# Altium PCB PcbForControlBoard.PcbDoc (part 1 of 2)
Units mm, origin at the board's own origin, x right, y up, seen from the top; angles counter-clockwise.
Board outline 90 x 35 mm, 4 copper layers (Top Layer, MID1, MID2, Bottom Layer), stack 0.603 mm thick; 169 components, 143 nets, 686 pads, 29 vias.
Unrouted connection lines stored in the file: 418.
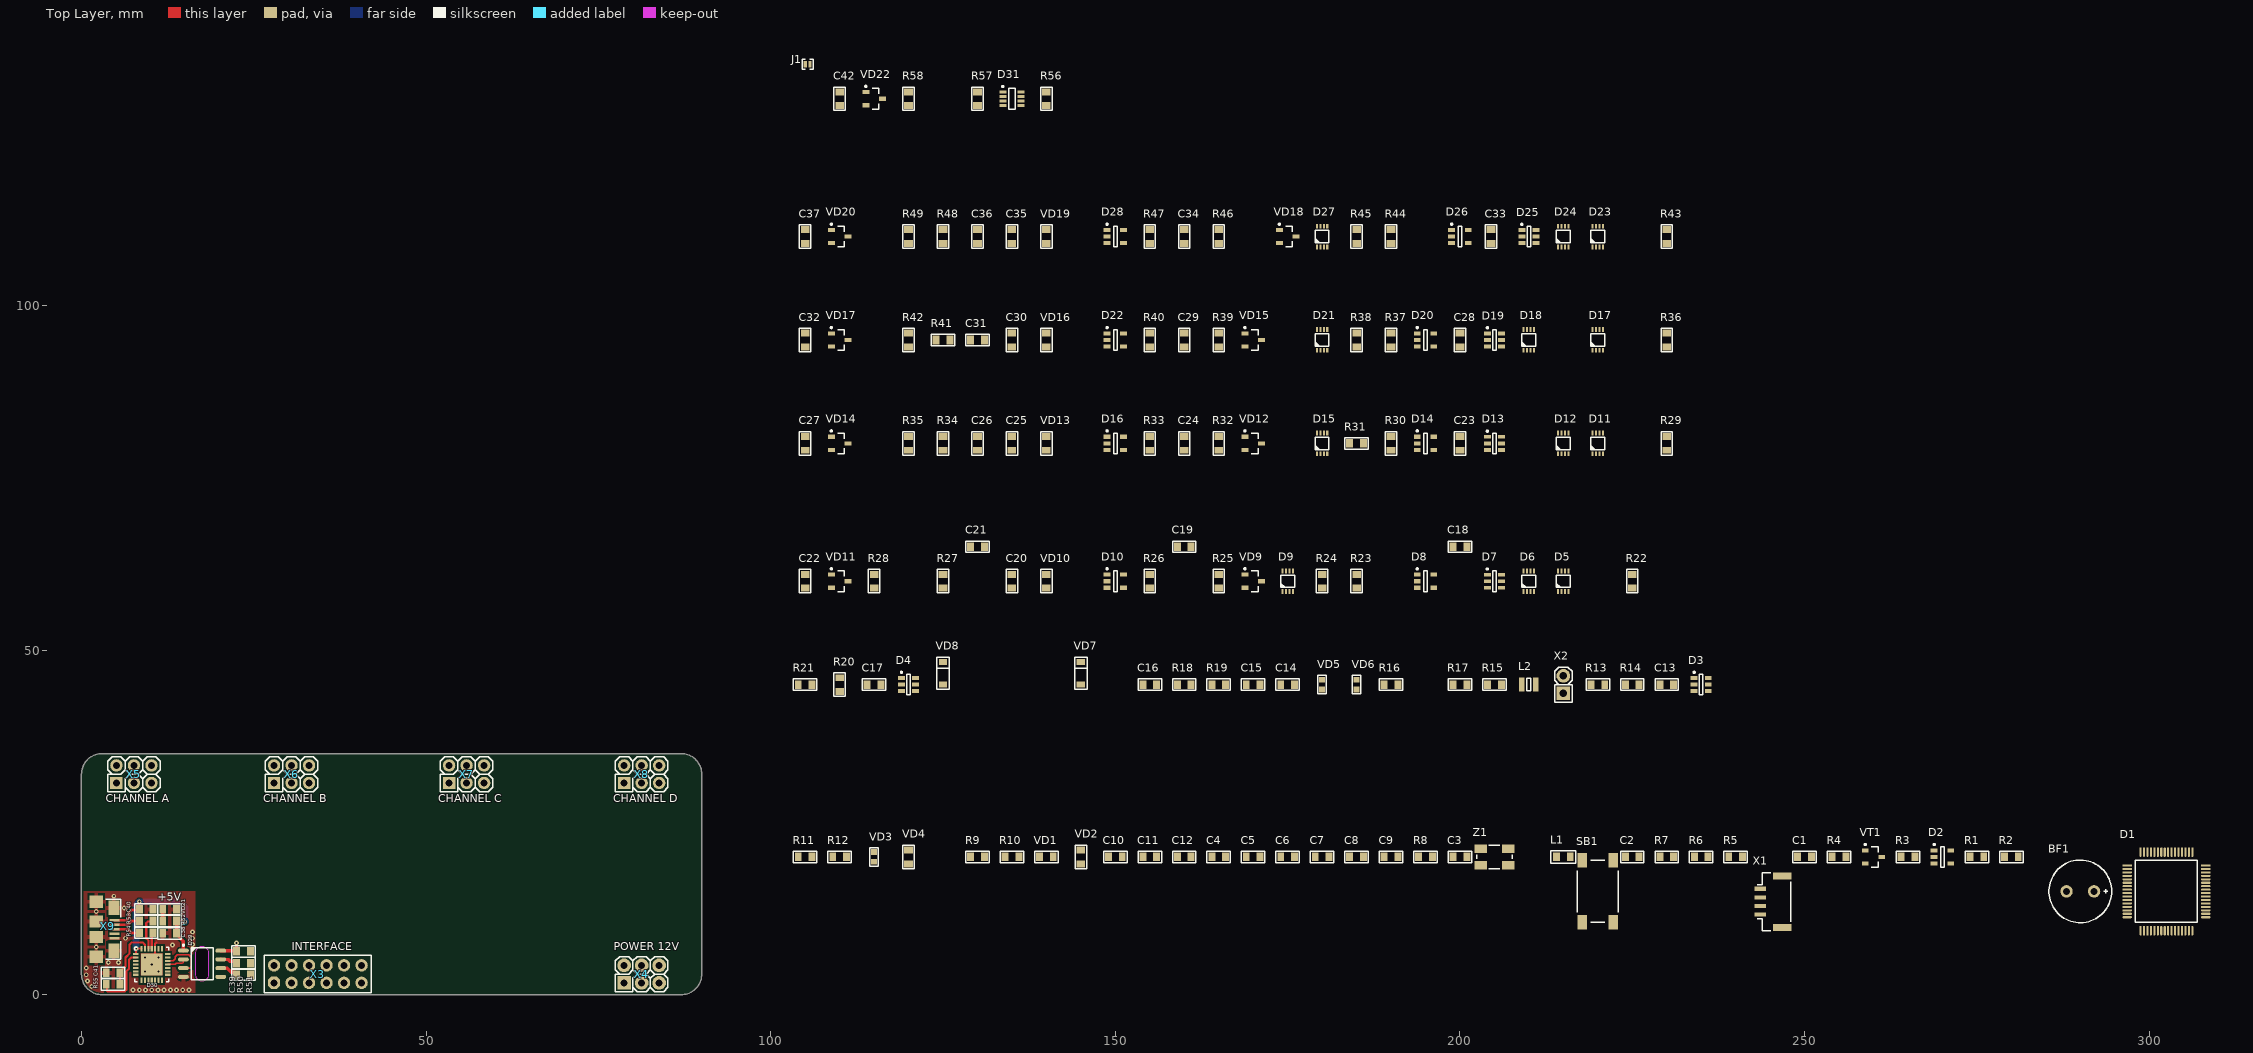
[diagram p0: Top Layer view]
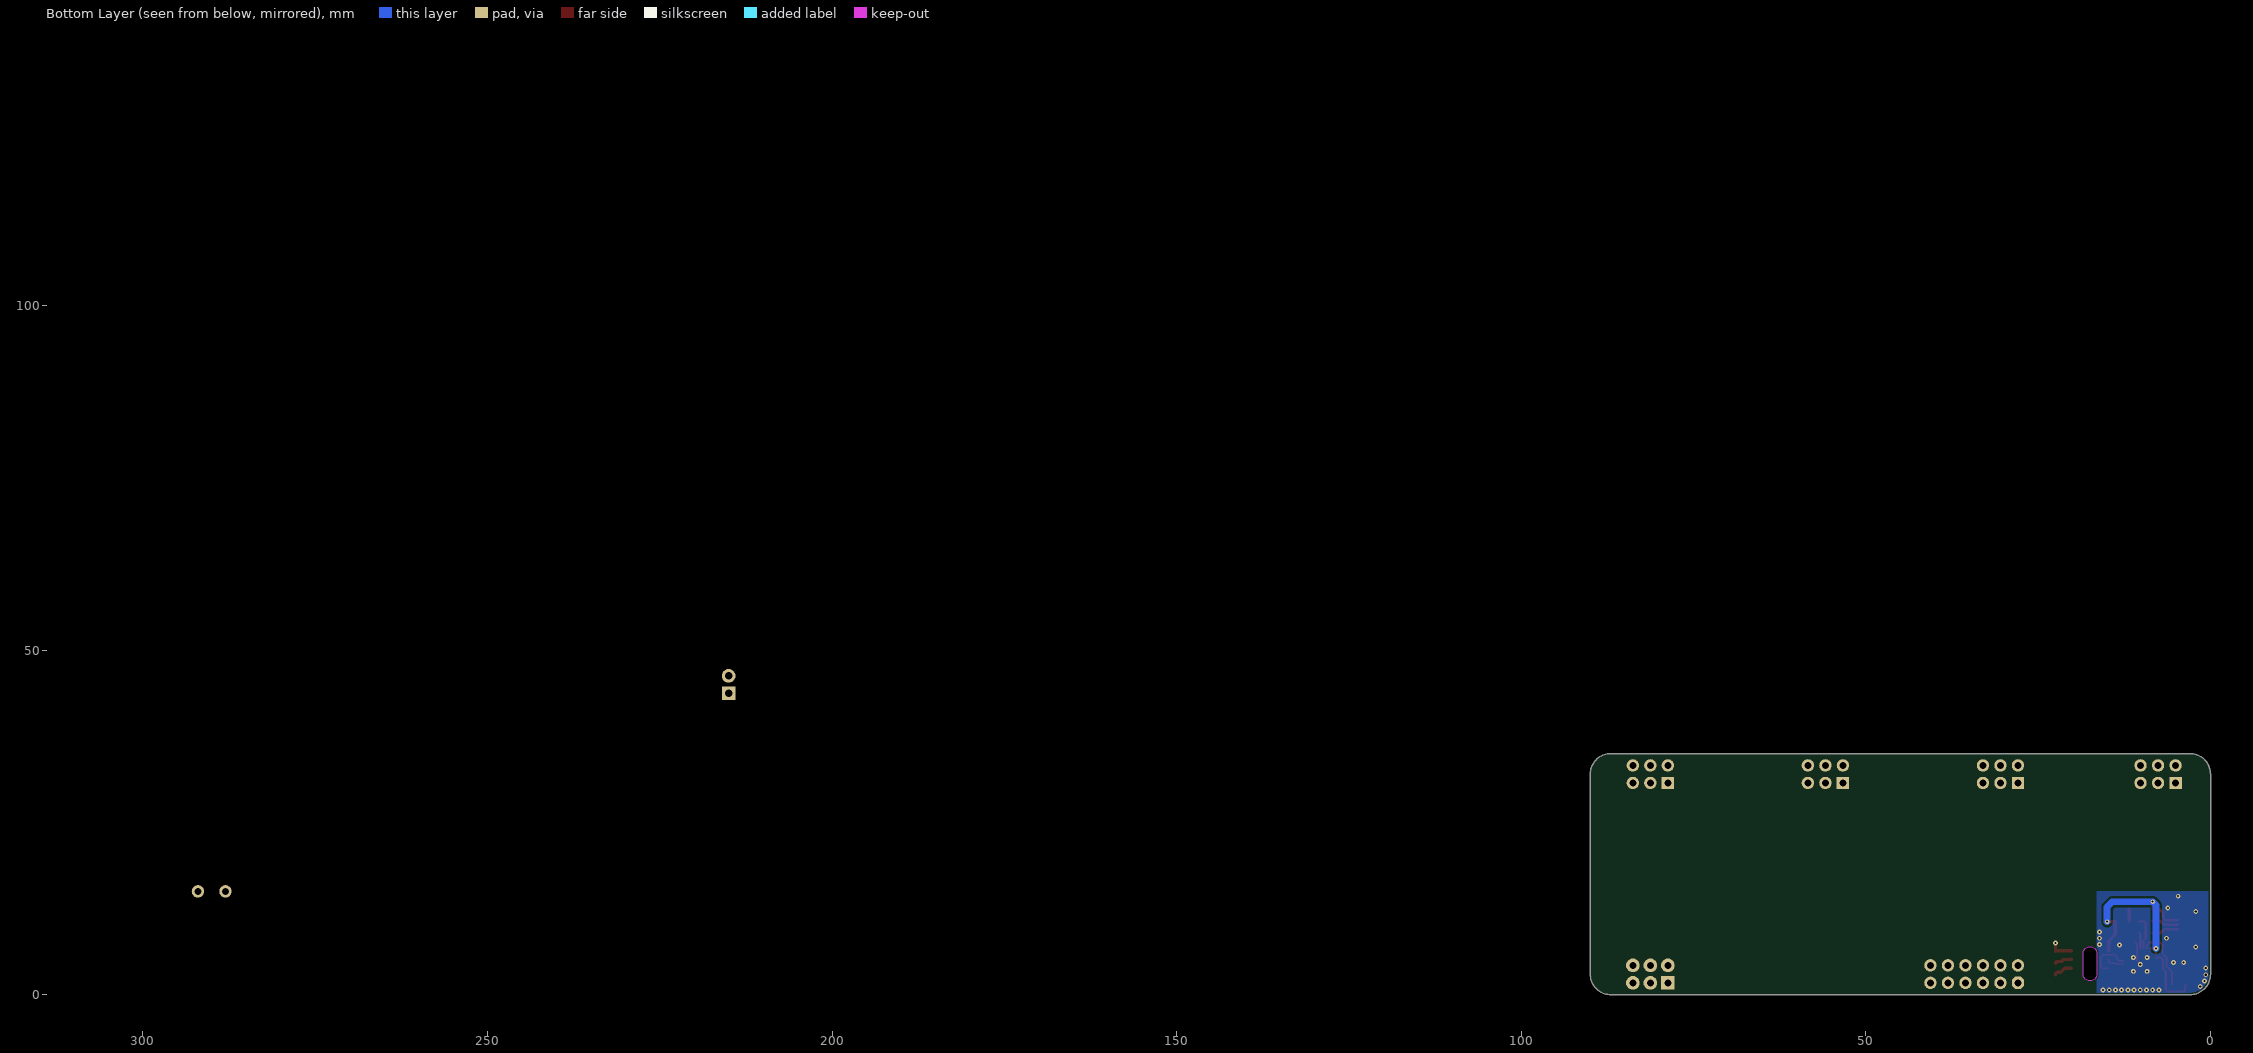
[diagram p1: Bottom Layer view, seen from below]
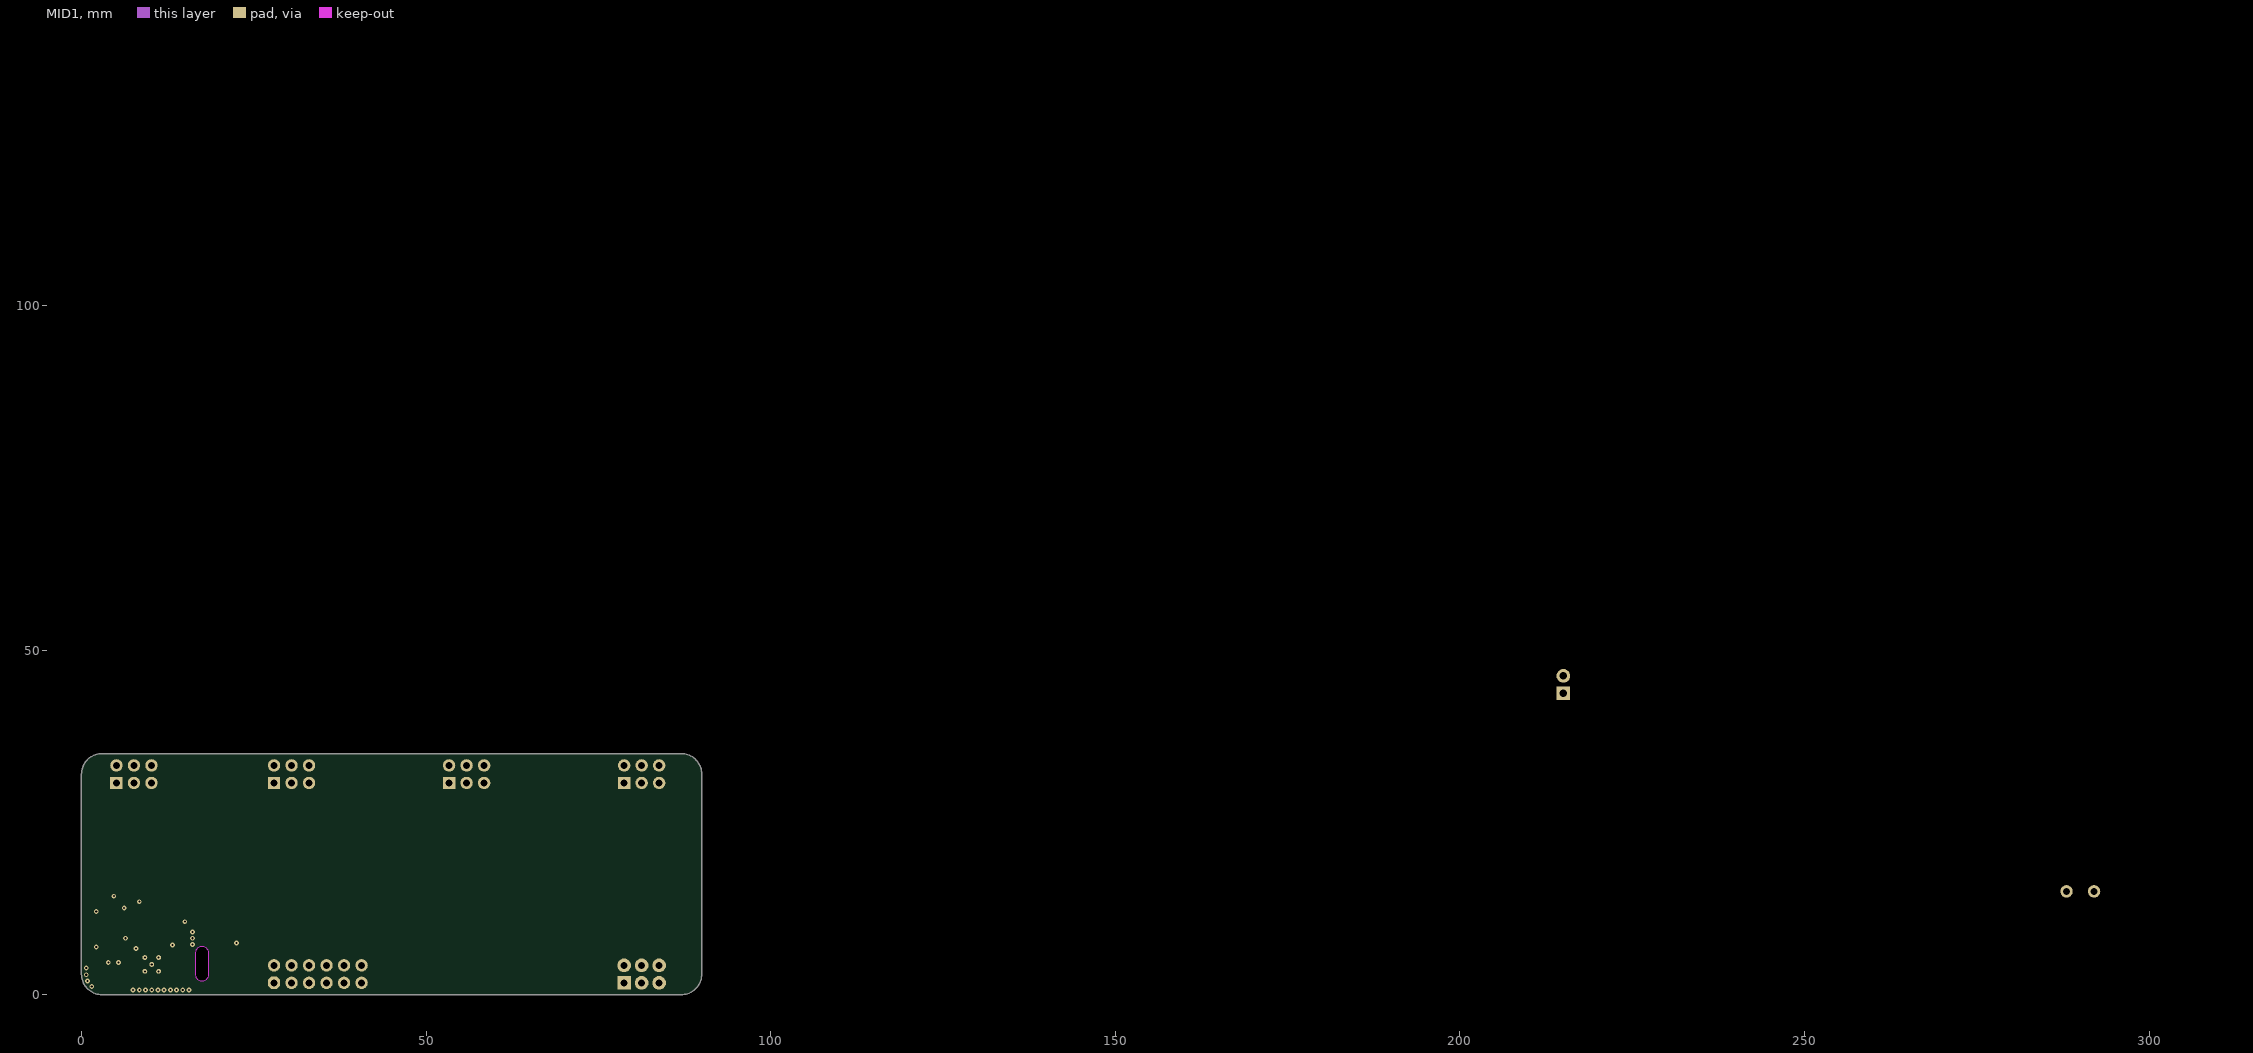
[diagram p2: MID1]
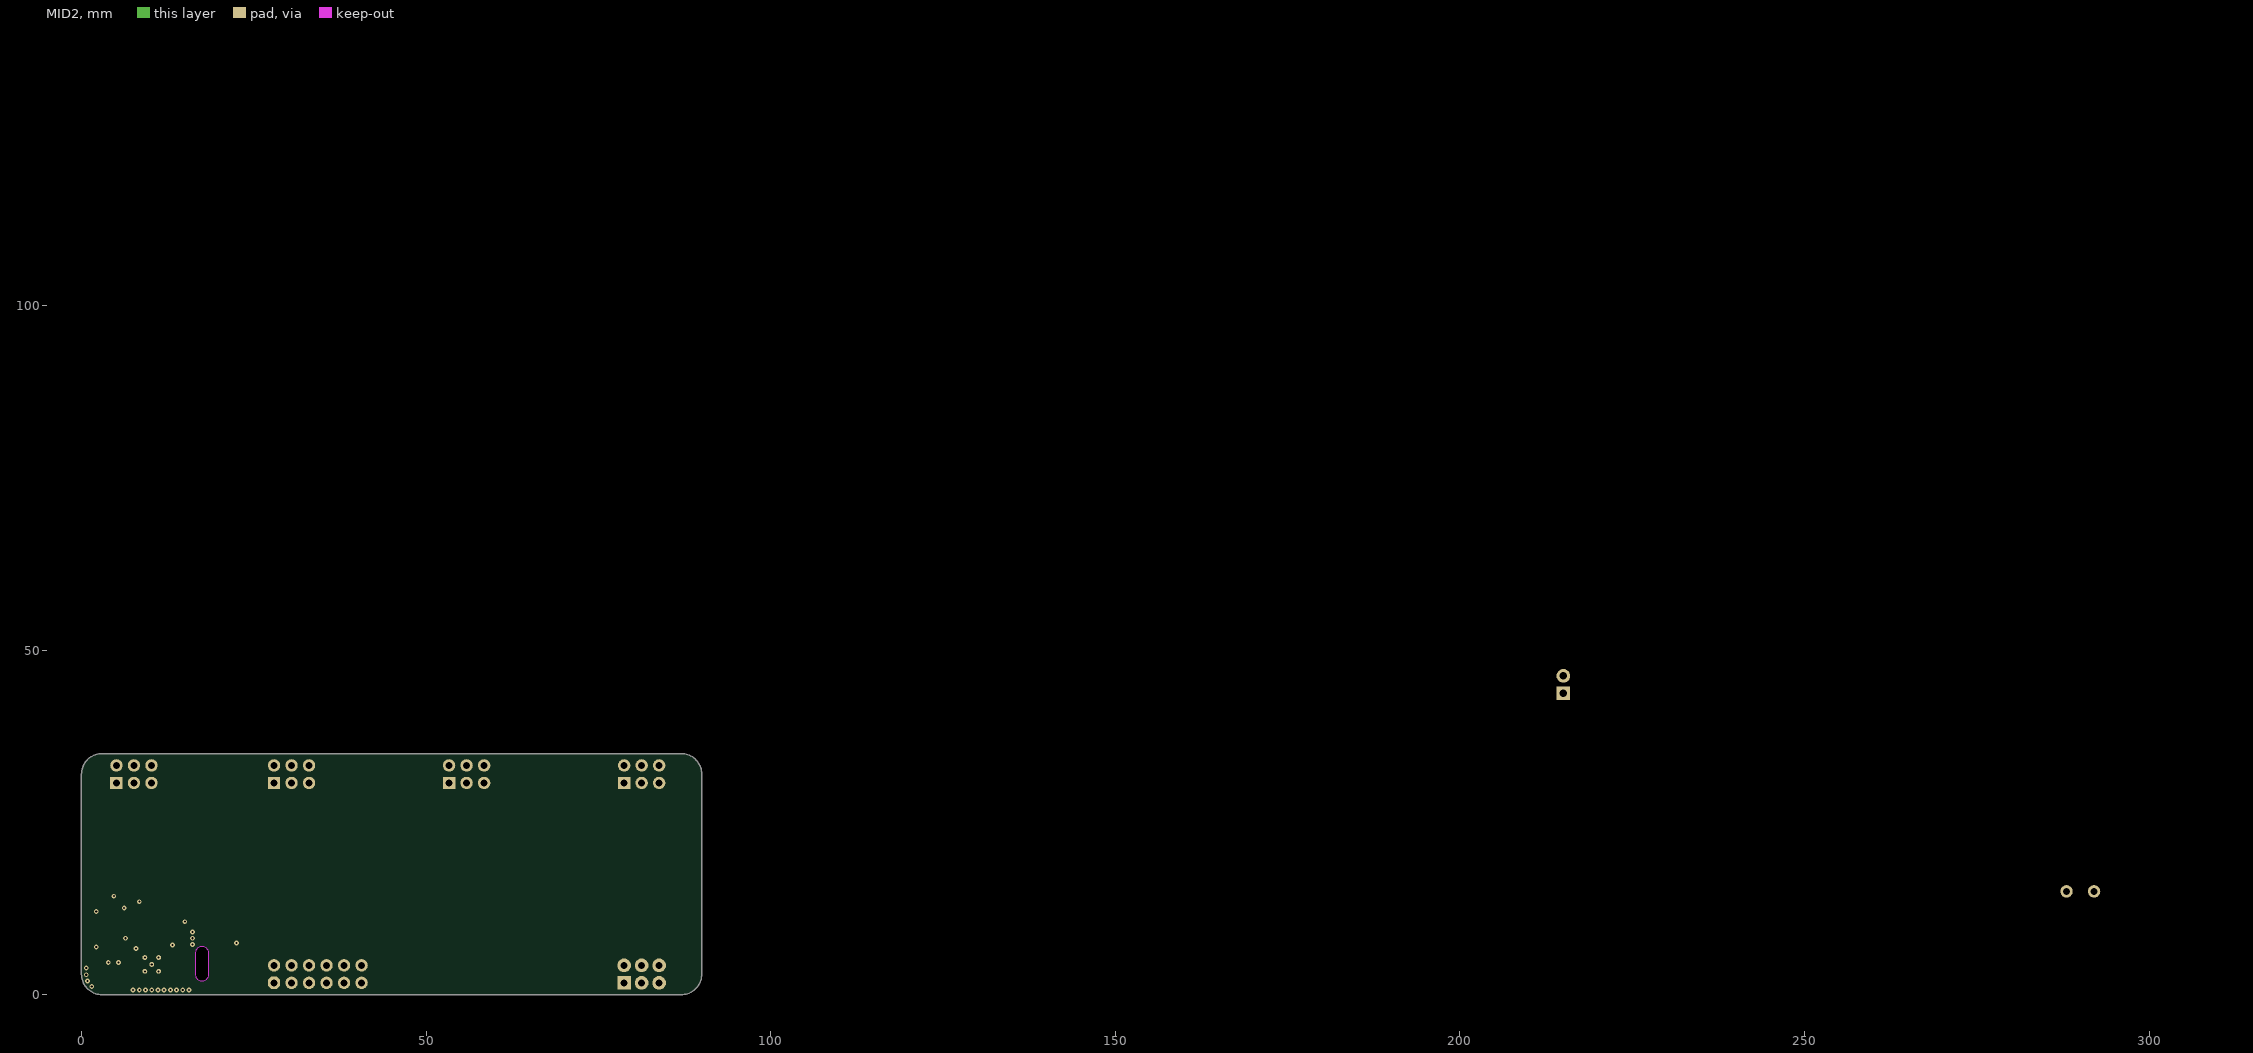
[diagram p3: MID2]

## Layer stack, top to bottom
Top Solder: solder mask 0.0102, Solder Resist, Dk 3.5
Top Layer: signal copper 0.0356
Dielectric 2: prepreg 0.0711, PP-006, Dk 4.1
MID1: signal copper 0.035
Dielectric 1: dielectric 0.32, FR-4, Dk 4.8
MID2: signal copper 0.035
Dielectric 3: prepreg 0.0711, PP-006, Dk 4.1
Bottom Layer: signal copper 0.0356
Bottom Solder: solder mask 0.0102, Solder Resist, Dk 3.5

## Board outline
0,3 0,32 cw(c3,32) 3,35 87,35 cw(c87,32) 90,32 90,3 cw(c87,3) 87,0 3,0 cw(c3,3)
cut-out: 16.5,3 ccw(c17.5,3) 18.5,3 18.5,6 ccw(c17.5,6) 16.5,6

## Design rules (kind name [scope] priority, off if disabled: settings)
BoardOutlineClearance [All] p1: gap=0.3 ignorepadtopadclearanceinfootprint=FALSE
Clearance Clearance_NPTH [All vs InPadClass('NPTH')] p1: gap=0.4 ignorepadtopadclearanceinfootprint=FALSE except(0: Arc-Hole Track-Hole SMDPad-Hole THPad-Hole Via-Hole Fill-Hole Poly-Hole Region-Hole Text-Hole)
Clearance Clearance_MultiLayerPad [OnLayer('Multi-Layer') and IsPad] p2: gap=0.2 ignorepadtopadclearanceinfootprint=FALSE except(0: Arc-Hole Track-Hole SMDPad-Hole THPad-Hole Via-Hole Fill-Hole Poly-Hole Region-Hole Text-Hole; 0.25: Arc-Text Track-Text SMDPad-Text THPad-Text Via-Text Fill-Text Poly-Text Region-Text Text-Text)
Clearance Clearance_Polygon [InPolygon] p3: gap=0.3 ignorepadtopadclearanceinfootprint=FALSE except(0: Arc-Hole Track-Hole SMDPad-Hole THPad-Hole Via-Hole Fill-Hole Poly-Hole Region-Hole Text-Hole; 0.5: Poly-Poly)
Clearance [All] p4: gap=0.2 ignorepadtopadclearanceinfootprint=FALSE except(0: Arc-Hole Track-Hole SMDPad-Hole THPad-Hole Via-Hole Fill-Hole Poly-Hole Region-Hole Text-Hole)
Height [All] p1: minheight=0 maxheight=60 prefheight=12.7
HoleSize [All] p1: absolutevalues=TRUE maxlimit=5 minlimit=0.025 maxpercent=80.000 minpercent=20.000
HoleToHoleClearance [All] p1: gap=0.2 allowstackedmicrovias=TRUE
MinimumSolderMaskSliver [All] p1: minsoldermaskwidth=0.05
PlaneClearance [All] p1: clearance=0.5
PlaneConnect [All] p1: planeconnectstyle=Relief reliefexpansion=0.5 reliefentries=4 reliefconductorwidth=0.3 reliefairgap=0.2
PolygonConnect PolygonConnect_PowerPAD [All vs InPadClass('PowerPAD')] p1: connectstyle=Direct reliefconductorwidth=1 reliefentries=4 polygonreliefangle="90 Angle" airgapwidth=0.3
PolygonConnect PolygonConnect_PadGND [InNet('GND') and IsPad] p2: connectstyle=Relief reliefconductorwidth=0.5 reliefentries=4 polygonreliefangle="90 Angle" airgapwidth=0.2
PolygonConnect PolygonConnect_Via [IsVia] p3: connectstyle=Direct reliefconductorwidth=0.254 reliefentries=4 polygonreliefangle="90 Angle" airgapwidth=0.254
PolygonConnect [All] p4: connectstyle=Relief reliefconductorwidth=0.6 reliefentries=4 polygonreliefangle="90 Angle" airgapwidth=0.3
RoutingVias [All] p1: holewidth=0.3 width=0.7 viastyle="Through Hole" minholewidth=0.3 minwidth=0.7 maxholewidth=0.5 maxwidth=1.2
SilkToSilkClearance [All] p1: silktosilkclearance=0
SilkToSolderMaskClearance [IsPad] p1: minsilkscreentomaskgap=0.05 clearancetoexposedcopper=TRUE
SolderMaskExpansion [All] p1: expansion=0.075
Width [All] p1: maxlimit=10 minlimit=0.15 preferedwidth=0.15
22 further rules are at their usual default settings.

## Classes and differential pairs
pad class PowerPAD: D30-0
component class UsbCanInterface: C38 C39 C40 C41 C42 D29 D30 D31 J1 R50 R51 R52 R53 R54 R55 R56 R57 R58 VD21 VD22 X9
component class ProtectionChannelD: C33 C34 C35 C36 C37 D23 D24 D25 D26 D27 D28 R43 R44 R45 R46 R47 R48 R49 VD18 VD19 VD20 X8
component class ProtectionChannelC: C28 C29 C30 C31 C32 D17 D18 D19 D20 D21 D22 R36 R37 R38 R39 R40 R41 R42 VD15 VD16 VD17 X7
component class ProtectionChannelB: C23 C24 C25 C26 C27 D11 D12 D13 D14 D15 D16 R29 R30 R31 R32 R33 R34 R35 VD12 VD13 VD14 X6
component class ProtectionChannelA: C18 C19 C20 C21 C22 D5 D6 D7 D8 D9 D10 R22 R23 R24 R25 R26 R27 R28 VD9 VD10 VD11 X5
component class PowerAndSystem: C13 C14 C15 C16 C17 D3 D4 L2 R13 R14 R15 R16 R17 R18 R19 R20 R21 VD5 VD6 VD7 VD8 X2 X3 X4
component class MainMCU: BF1 C1 C2 C3 C4 C5 C6 C7 C8 C9 C10 C11 C12 D1 D2 L1 R1 R2 R3 R4 R5 R6 R7 R8 R9 R10 R11 R12 SB1 VD1 VD2 VD3 VD4 VT1 X1 Z1

## Components (designator, comment, footprint, x,y, rotation, side; value= is the part's Value field where it differs from the comment)
BF1 "DIP switch, 2.73 kHz, 3VDC, 80mA, -20...+70°C" "BUZ: AT-0927-TT-6-R" 290,15 r0 top
C1 "Ceramic capacitor, 0.1μF, X7R, ±10%, 16V, 0805, -55...+125°C" "CAP: 0805" 250,20 r0 top value=0.1?F
C2 "Ceramic capacitor, 1μF, X7R, ±10%, 16V, 0805, -55...+125°C" "CAP: 0805" 225,20 r0 top value=1?F
C3 "Ceramic capacitor, 0.1μF, X7R, ±10%, 16V, 0805, -55...+125°C" "CAP: 0805" 200,20 r0 top value=0.1?F
C4 "Ceramic capacitor, 0.1μF, X7R, ±10%, 16V, 0805, -55...+125°C" "CAP: 0805" 165,20 r0 top value=0.1?F
C5 "Ceramic capacitor, 0.1μF, X7R, ±10%, 16V, 0805, -55...+125°C" "CAP: 0805" 170,20 r0 top value=0.1?F
C6 "Ceramic capacitor, 0.1μF, X7R, ±10%, 16V, 0805, -55...+125°C" "CAP: 0805" 175,20 r0 top value=0.1?F
C7 "Ceramic capacitor, 0.1μF, X7R, ±10%, 16V, 0805, -55...+125°C" "CAP: 0805" 180,20 r0 top value=0.1?F
C8 "Ceramic capacitor, 18pF, NPO, ±10%, 50V, 0805, -55...+125°C" "CAP: 0805" 185,20 r0 top value=18pF
C9 "Ceramic capacitor, 18pF, NPO, ±10%, 50V, 0805, -55...+125°C" "CAP: 0805" 190,20 r0 top value=18pF
C10 "Ceramic capacitor, 1μF, X7R, ±10%, 16V, 0805, -55...+125°C" "CAP: 0805" 150,20 r0 top value=1?F
C11 "Ceramic capacitor, 0.1μF, X7R, ±10%, 16V, 0805, -55...+125°C" "CAP: 0805" 155,20 r0 top value=0.1?F
C12 "Ceramic capacitor, 0.01μF, X7R, ±10%, 50V, 0805, -55...+125°C" "CAP: 0805" 160,20 r0 top value=0.01?F
C13 "Ceramic capacitor, 0.01μF, X7R, ±10%, 50V, 0805, -55...+125°C" "CAP: 0805" 230,45 r0 top value=0.01?F
C14 "Ceramic capacitor, 4.7μF, X7R, ±10%, 25V, 0805, -55...+125°C" "CAP: 0805" 175,45 r0 top value=4.7?F
C15 "Ceramic capacitor, 10μF, X7R, ±10%, 6.3V, 0805, -55...+125°C" "CAP: 0805" 170,45 r0 top value=10?F
C16 "Ceramic capacitor, 0.1μF, X7R, ±10%, 16V, 0805, -55...+125°C" "CAP: 0805" 155,45 r0 top value=0.1?F
C17 "Ceramic capacitor, 0.1μF, X7R, ±10%, 16V, 0805, -55...+125°C" "CAP: 0805" 115,45 r0 top value=0.1?F
C18 "Ceramic capacitor, 0.1μF, X7R, ±10%, 16V, 0805, -55...+125°C" "CAP: 0805" 200,65 r0 top value=0.1?F
C19 "Ceramic capacitor, 0.01μF, X7R, ±10%, 50V, 0805, -55...+125°C" "CAP: 0805" 160,65 r0 top value=0.01?F
C20 "Ceramic capacitor, 0.1μF, X7R, ±10%, 16V, 0805, -55...+125°C" "CAP: 0805" 135,60 r90 top value=0.1?F
C21 "Ceramic capacitor, 0.1μF, X7R, ±10%, 16V, 0805, -55...+125°C" "CAP: 0805" 130,65 r0 top value=0.1?F
C22 "Ceramic capacitor, 0.01μF, X7R, ±10%, 50V, 0805, -55...+125°C" "CAP: 0805" 105,60 r90 top value=0.01?F
C23 "Ceramic capacitor, 0.1μF, X7R, ±10%, 16V, 0805, -55...+125°C" "CAP: 0805" 200,80 r90 top value=0.1?F
C24 "Ceramic capacitor, 0.01μF, X7R, ±10%, 50V, 0805, -55...+125°C" "CAP: 0805" 160,80 r90 top value=0.01?F
C25 "Ceramic capacitor, 0.1μF, X7R, ±10%, 16V, 0805, -55...+125°C" "CAP: 0805" 135,80 r90 top value=0.1?F
C26 "Ceramic capacitor, 0.1μF, X7R, ±10%, 16V, 0805, -55...+125°C" "CAP: 0805" 130,80 r90 top value=0.1?F
C27 "Ceramic capacitor, 0.01μF, X7R, ±10%, 50V, 0805, -55...+125°C" "CAP: 0805" 105,80 r90 top value=0.01?F
C28 "Ceramic capacitor, 0.1μF, X7R, ±10%, 16V, 0805, -55...+125°C" "CAP: 0805" 200,95 r90 top value=0.1?F
C29 "Ceramic capacitor, 0.01μF, X7R, ±10%, 50V, 0805, -55...+125°C" "CAP: 0805" 160,95 r90 top value=0.01?F
C30 "Ceramic capacitor, 0.1μF, X7R, ±10%, 16V, 0805, -55...+125°C" "CAP: 0805" 135,95 r90 top value=0.1?F
C31 "Ceramic capacitor, 0.1μF, X7R, ±10%, 16V, 0805, -55...+125°C" "CAP: 0805" 130,95 r0 top value=0.1?F
C32 "Ceramic capacitor, 0.01μF, X7R, ±10%, 50V, 0805, -55...+125°C" "CAP: 0805" 105,95 r90 top value=0.01?F
C33 "Ceramic capacitor, 0.1μF, X7R, ±10%, 16V, 0805, -55...+125°C" "CAP: 0805" 204.5,110 r90 top value=0.1?F
C34 "Ceramic capacitor, 0.01μF, X7R, ±10%, 50V, 0805, -55...+125°C" "CAP: 0805" 160,110 r90 top value=0.01?F
C35 "Ceramic capacitor, 0.1μF, X7R, ±10%, 16V, 0805, -55...+125°C" "CAP: 0805" 135,110 r90 top value=0.1?F
C36 "Ceramic capacitor, 0.1μF, X7R, ±10%, 16V, 0805, -55...+125°C" "CAP: 0805" 130,110 r90 top value=0.1?F
C37 "Ceramic capacitor, 0.01μF, X7R, ±10%, 50V, 0805, -55...+125°C" "CAP: 0805" 105,110 r90 top value=0.01?F
C38 "Ceramic capacitor, 0.1μF, X7R, ±10%, 16V, 0805, -55...+125°C" "CAP: 0805" 12.8,8.9 r0 top value=0.1?F
C39 "Ceramic capacitor, 0.1μF, X7R, ±10%, 16V, 0805, -55...+125°C" "CAP: 0805" 23.5,6.3 r180 top value=0.1?F
C40 "Ceramic capacitor, 10μF, X7R, ±10%, 6.3V, 0805, -55...+125°C" "CAP: 0805" 9.4,12.4 r180 top value=10?F
C41 "Ceramic capacitor, 1μF, X7R, ±10%, 16V, 0805, -55...+125°C" "CAP: 0805" 4.6,3.2 r0 top value=1?F
C42 "Ceramic capacitor, 0.1μF, X7R, ±10%, 16V, 0805, -55...+125°C" "CAP: 0805" 110,130 r90 top value=0.1?F
D1 "IC microcontroller, 32-Bit, Cortex-M4, 170MHz, 512KB, 128KB, 1.71...3.6V, -40...+85°C, 64-LQFP" 64-LQFP 302.5,15 r0 top
D2 "IC memory, EEPROM, 1KB (128x8), 400 kHz, I2C, 1.7...5.5V, -40...+85°C, SOT-23-5" SOT23-5 270,20 r0 top
D3 "DC/DC buck converter, input 4.5...18V, 1.4MHz, output 0.81...15V, 1.5A, -40...+85°C, SOT23-6" SOT23-6 235,45 r0 top
D4 "IC logic buffer, 1.65...5.5V, -40...+125°C, SOT23-6" SOT23-6 120,45 r0 top
D5 "IC logic AND, 0.8...3.6V, -40...+855°C, 8-VSSOP" 8-VSSOP 215,60 r0 top
D6 "IC logic AND, 0.8...3.6V, -40...+855°C, 8-VSSOP" 8-VSSOP 210,60 r0 top
D7 "IC logic buffer, 1.65...5.5V, -40...+125°C, SOT23-6" SOT23-6 205,60 r0 top
D8 "IC logic XOR, 1.65...5.5V, -40...+125°C, SOT23-5" SOT23-5 195,60 r0 top
D9 "ICtrigger D-type, 0.8...3.6V, -40...+85°C, 8-VSSOP" 8-VSSOP 175,60 r0 top
D10 "IC Schmitt trigger, 0.8...3.6V, -40...+85°C, SOT23-6" SOT23-5 150,60 r0 top
D11 "IC logic AND, 0.8...3.6V, -40...+855°C, 8-VSSOP" 8-VSSOP 220,80 r0 top
D12 "IC logic AND, 0.8...3.6V, -40...+855°C, 8-VSSOP" 8-VSSOP 215,80 r0 top
D13 "IC logic buffer, 1.65...5.5V, -40...+125°C, SOT23-6" SOT23-6 205,80 r0 top
D14 "IC logic XOR, 1.65...5.5V, -40...+125°C, SOT23-5" SOT23-5 195,80 r0 top
D15 "ICtrigger D-type, 0.8...3.6V, -40...+85°C, 8-VSSOP" 8-VSSOP 180,80 r0 top
D16 "IC Schmitt trigger, 0.8...3.6V, -40...+85°C, SOT23-6" SOT23-5 150,80 r0 top
D17 "IC logic AND, 0.8...3.6V, -40...+855°C, 8-VSSOP" 8-VSSOP 220,95 r0 top
D18 "IC logic AND, 0.8...3.6V, -40...+855°C, 8-VSSOP" 8-VSSOP 210,95 r0 top
D19 "IC logic buffer, 1.65...5.5V, -40...+125°C, SOT23-6" SOT23-6 205,95 r0 top
D20 "IC logic XOR, 1.65...5.5V, -40...+125°C, SOT23-5" SOT23-5 195,95 r0 top
D21 "ICtrigger D-type, 0.8...3.6V, -40...+85°C, 8-VSSOP" 8-VSSOP 180,95 r0 top
D22 "IC Schmitt trigger, 0.8...3.6V, -40...+85°C, SOT23-6" SOT23-5 150,95 r0 top
D23 "IC logic AND, 0.8...3.6V, -40...+855°C, 8-VSSOP" 8-VSSOP 220,110 r0 top
D24 "IC logic AND, 0.8...3.6V, -40...+855°C, 8-VSSOP" 8-VSSOP 215,110 r0 top
D25 "IC logic buffer, 1.65...5.5V, -40...+125°C, SOT23-6" SOT23-6 210,110 r0 top
D26 "IC logic XOR, 1.65...5.5V, -40...+125°C, SOT23-5" SOT23-5 200,110 r0 top
D27 "ICtrigger D-type, 0.8...3.6V, -40...+85°C, 8-VSSOP" 8-VSSOP 180,110 r0 top
D28 "IC Schmitt trigger, 0.8...3.6V, -40...+85°C, SOT23-6" SOT23-5 150,110 r0 top
D29 "IC digital isolator, 100Mbps, 3000Vrms, 2.25...5.5V, -55...+125°C, 8-SOIC" 8-SOIC 17.5,4.5 r0 top
D30 "IC usb-to-uart bridge, USB2.0, 3...3.6V, -40...+85°C, 28-VFQFN" "28-QFN (5x5)" 10.2,4.4 r270 top
D31 "IC CAN transceiver, 1Mbps, Half-duplex, 3...3.6V, -40...+125°C, SOT23-8" SOT23-8 135,130 r0 top
J1 "=ValueManufacturerPartNumber" "CON: JUMPER x1" 105,135 r0 top
L1 "Fixed inductor, 10μH, ±20%, 0805, 100mA, -55...+125°C" "IND: 0805" 215,20 r0 top value=10?H
L2 "Fixed inductor, 4.7μH, ±20%, SRP2510A, 1.36A, -40...+125°C" "IND: SRP2510A" 210,45 r0 top value=4.7?H
R1 "Resistor film, 4k7, ±5%, 0805, 0.125W, -55...+125°C" "RES: 0805" 275,20 r0 top value=4k7
R2 "Resistor film, 4k7, ±5%, 0805, 0.125W, -55...+125°C" "RES: 0805" 280,20 r0 top value=4k7
R3 "Resistor film, 100R, ±5%, 0805, 0.125W, -55...+125°C" "RES: 0805" 265,20 r0 top value=100R
R4 "Resistor film, 10k, ±5%, 0805, 0.125W, -55...+125°C" "RES: 0805" 255,20 r0 top value=10k
R5 "Resistor film, 10k, ±5%, 0805, 0.125W, -55...+125°C" "RES: 0805" 240,20 r0 top value=10k
R6 "Resistor film, 10k, ±5%, 0805, 0.125W, -55...+125°C" "RES: 0805" 235,20 r0 top value=10k
R7 "Resistor film, 100R, ±5%, 0805, 0.125W, -55...+125°C" "RES: 0805" 230,20 r0 top value=100R
R8 "Resistor film, 10k, ±5%, 0805, 0.125W, -55...+125°C" "RES: 0805" 195,20 r0 top value=10k
R9 "Resistor film, 470R, ±5%, 0805, 0.125W, -55...+125°C" "RES: 0805" 130,20 r0 top value=470R
R10 "Resistor film, 470R, ±5%, 0805, 0.125W, -55...+125°C" "RES: 0805" 135,20 r0 top value=470R
R11 "Resistor film, 470R, ±5%, 0805, 0.125W, -55...+125°C" "RES: 0805" 105,20 r0 top value=470R
R12 "Resistor film, 470R, ±5%, 0805, 0.125W, -55...+125°C" "RES: 0805" 110,20 r0 top value=470R
R13 "Resistor film, 4k7, ±5%, 0805, 0.125W, -55...+125°C" "RES: 0805" 220,45 r0 top value=4k7
R14 "Resistor film, 470R, ±5%, 0805, 0.125W, -55...+125°C" "RES: 0805" 225,45 r0 top value=470R
R15 "Resistor film, 10k, ±5%, 0805, 0.125W, -55...+125°C" "RES: 0805" 205,45 r0 top value=10k
R16 "Resistor film, 8k2, ±5%, 0805, 0.125W, -55...+125°C" "RES: 0805" 190,45 r0 top value=8k2
R17 "Resistor film, 100R, ±5%, 0805, 0.125W, -55...+125°C" "RES: 0805" 200,45 r0 top value=100R
R18 "Resistor film, 2k7, ±5%, 0805, 0.125W, -55...+125°C" "RES: 0805" 160,45 r0 top value=2k7
R19 "Resistor film, 10k, ±5%, 0805, 0.125W, -55...+125°C" "RES: 0805" 165,45 r0 top value=10k
R20 "Resistor film, 10k, ±5%, 0805, 0.125W, -55...+125°C" "RES: 0805" 110,45 r90 top value=10k
R21 "Resistor film, 10k, ±5%, 0805, 0.125W, -55...+125°C" "RES: 0805" 105,45 r0 top value=10k
R22 "Resistor film, 10k, ±5%, 0805, 0.125W, -55...+125°C" "RES: 0805" 225,60 r90 top value=10k
R23 "Resistor film, 10k, ±5%, 0805, 0.125W, -55...+125°C" "RES: 0805" 185,60 r90 top value=10k
R24 "Resistor film, 100R, ±5%, 0805, 0.125W, -55...+125°C" "RES: 0805" 180,60 r90 top value=100R
R25 "Resistor film, 10k, ±5%, 0805, 0.125W, -55...+125°C" "RES: 0805" 165,60 r90 top value=10k
R26 "Resistor film, 470R, ±5%, 0805, 0.125W, -55...+125°C" "RES: 0805" 155,60 r90 top value=470R
R27 "Resistor film, 10k, ±5%, 0805, 0.125W, -55...+125°C" "RES: 0805" 125,60 r90 top value=10k
R28 "Resistor film, 100R, ±5%, 0805, 0.125W, -55...+125°C" "RES: 0805" 115,60 r90 top value=100R
R29 "Resistor film, 10k, ±5%, 0805, 0.125W, -55...+125°C" "RES: 0805" 230,80 r90 top value=10k
R30 "Resistor film, 10k, ±5%, 0805, 0.125W, -55...+125°C" "RES: 0805" 190,80 r90 top value=10k
R31 "Resistor film, 100R, ±5%, 0805, 0.125W, -55...+125°C" "RES: 0805" 185,80 r0 top value=100R
R32 "Resistor film, 10k, ±5%, 0805, 0.125W, -55...+125°C" "RES: 0805" 165,80 r90 top value=10k
R33 "Resistor film, 470R, ±5%, 0805, 0.125W, -55...+125°C" "RES: 0805" 155,80 r90 top value=470R
R34 "Resistor film, 10k, ±5%, 0805, 0.125W, -55...+125°C" "RES: 0805" 125,80 r90 top value=10k
R35 "Resistor film, 100R, ±5%, 0805, 0.125W, -55...+125°C" "RES: 0805" 120,80 r90 top value=100R
R36 "Resistor film, 10k, ±5%, 0805, 0.125W, -55...+125°C" "RES: 0805" 230,95 r90 top value=10k
R37 "Resistor film, 10k, ±5%, 0805, 0.125W, -55...+125°C" "RES: 0805" 190,95 r90 top value=10k
R38 "Resistor film, 100R, ±5%, 0805, 0.125W, -55...+125°C" "RES: 0805" 185,95 r90 top value=100R
R39 "Resistor film, 10k, ±5%, 0805, 0.125W, -55...+125°C" "RES: 0805" 165,95 r90 top value=10k
R40 "Resistor film, 470R, ±5%, 0805, 0.125W, -55...+125°C" "RES: 0805" 155,95 r90 top value=470R
R41 "Resistor film, 10k, ±5%, 0805, 0.125W, -55...+125°C" "RES: 0805" 125,95 r0 top value=10k
R42 "Resistor film, 100R, ±5%, 0805, 0.125W, -55...+125°C" "RES: 0805" 120,95 r90 top value=100R
R43 "Resistor film, 10k, ±5%, 0805, 0.125W, -55...+125°C" "RES: 0805" 230,110 r90 top value=10k
R44 "Resistor film, 10k, ±5%, 0805, 0.125W, -55...+125°C" "RES: 0805" 190,110 r90 top value=10k
R45 "Resistor film, 100R, ±5%, 0805, 0.125W, -55...+125°C" "RES: 0805" 185,110 r90 top value=100R
R46 "Resistor film, 10k, ±5%, 0805, 0.125W, -55...+125°C" "RES: 0805" 165,110 r90 top value=10k
R47 "Resistor film, 470R, ±5%, 0805, 0.125W, -55...+125°C" "RES: 0805" 155,110 r90 top value=470R
R48 "Resistor film, 10k, ±5%, 0805, 0.125W, -55...+125°C" "RES: 0805" 125,110 r90 top value=10k
R49 "Resistor film, 100R, ±5%, 0805, 0.125W, -55...+125°C" "RES: 0805" 120,110 r90 top value=100R
R50 "Resistor film, 100R, ±5%, 0805, 0.125W, -55...+125°C" "RES: 0805" 23.5,4.6 r0 top value=100R
R51 "Resistor film, 100R, ±5%, 0805, 0.125W, -55...+125°C" "RES: 0805" 23.5,2.9 r0 top value=100R
R52 "Resistor film, 1k, ±5%, 0805, 0.125W, -55...+125°C" "RES: 0805" 12.8,10.7 r0 top value=1k
R53 "Resistor film, 22R, ±5%, 0805, 0.125W, -55...+125°C" "RES: 0805" 9.4,10.7 r0 top value=22R
R54 "Resistor film, 22R, ±5%, 0805, 0.125W, -55...+125°C" "RES: 0805" 9.4,9 r0 top value=22R
R55 "Resistor film, 1k, ±5%, 0805, 0.125W, -55...+125°C" "RES: 0805" 4.6,1.5 r0 top value=1k
R56 "Resistor film, 100R, ±5%, 0805, 0.125W, -55...+125°C" "RES: 0805" 140,130 r90 top value=100R
R57 "Resistor film, 100R, ±5%, 0805, 0.125W, -55...+125°C" "RES: 0805" 130,130 r90 top value=100R
R58 "Resistor film, 120R, ±5%, 0805, 0.125W, -55...+125°C" "RES: 0805" 120,130 r90 top value=120R
SB1 "Tactile button, 6x6mm" "BUT: 6x6 SMD" 220,15 r90 top
VD1 "LED, 20mA, 3.2V, 0805, -55...+150°C" "LED: 0805B" 140,20 r0 top
VD2 "LED, 20mA, 2V, 0805, -55...+150°C" "LED: 0805R" 145,20 r90 top
VD3 "LED, 20mA, 2V, 0805, -55...+150°C" "LED: 0603G" 115,20 r90 top
VD4 "LED, 20mA, 2V, 0805, -55...+150°C" "LED: 0805R" 120,20 r90 top
VD5 "LED, 20mA, 2V, 0805, -55...+150°C" "LED: 0603G" 180,45 r90 top
VD6 "LED, 20mA, 2V, 0805, -55...+150°C" "LED: 0603G" 185,45 r90 top
VD7 "Schottky diode, 40V, 2A, 500mV, 15pF, SOD-123, -55...+150°C" "DIODE: SOD123" 145,45 r90 top
VD8 "Schottky diode, 40V, 2A, 500mV, 15pF, SOD-123, -55...+150°C" "DIODE: SOD123" 125,45 r90 top
VD9 "Diode array, 85V, 140mA, 1.1V, 3us, SOT-23, -65...+150°C" SOT23 170,60 r0 top
VD10 "LED, 20mA, 2V, 0805, -55...+150°C" "LED: 0805R" 140,60 r90 top
VD11 "Diode array, 85V, 140mA, 1.1V, 3us, SOT-23, -65...+150°C" SOT23 110,60 r0 top
VD12 "Diode array, 85V, 140mA, 1.1V, 3us, SOT-23, -65...+150°C" SOT23 170,80 r0 top
VD13 "LED, 20mA, 2V, 0805, -55...+150°C" "LED: 0805R" 140,80 r90 top
VD14 "Diode array, 85V, 140mA, 1.1V, 3us, SOT-23, -65...+150°C" SOT23 110,80 r0 top
VD15 "Diode array, 85V, 140mA, 1.1V, 3us, SOT-23, -65...+150°C" SOT23 170,95 r0 top
VD16 "LED, 20mA, 2V, 0805, -55...+150°C" "LED: 0805R" 140,95 r90 top
VD17 "Diode array, 85V, 140mA, 1.1V, 3us, SOT-23, -65...+150°C" SOT23 110,95 r0 top
VD18 "Diode array, 85V, 140mA, 1.1V, 3us, SOT-23, -65...+150°C" SOT23 175,110 r0 top
VD19 "LED, 20mA, 2V, 0805, -55...+150°C" "LED: 0805R" 140,110 r90 top
VD20 "Diode array, 85V, 140mA, 1.1V, 3us, SOT-23, -65...+150°C" SOT23 110,110 r0 top
VD21 "LED, 20mA, 2V, 0805, -55...+150°C" "LED: 0805G" 12.8,12.4 r0 top
VD22 "Zener diode, 24V, 350W peak, 30pF, 17Ohm, SOT-23, -55...+150°C" SOT23 115,130 r0 top
VT1 "MOSFET N-channel transistor, 30V, 5.3A, 2.6nC, 2.5W, 27mOhm, 382pF, SOT-23, -55...+150°C" SOT23 260,20 r0 top
X1 "Connector, 4pin, 1.25mm, 50VDC, 1A" "CON: SM04B-GHS" 248,13.5 r90 top
X2 "Connector, 2pin, 2.54mm, 500VAC, 3A" "CON: PLS-2" 215,45 r90 top
X3 "Connector, 12pin, 2.54mm, 500VAC, 3A" "CON: PBD-12" 34.29,3 r0 top locked
X4 "Connector, 6pin, 2.54mm, 500VAC, 3A" "CON: PLD-6"#1 81.28,3 r0 top locked
X5 "Connector, 6pin, 2.54mm, 500VAC, 3A" "CON: PLD-6"#2 7.62,32 r0 top locked
X6 "Connector, 6pin, 2.54mm, 500VAC, 3A" "CON: PLD-6"#2 30.48,32 r0 top locked
X7 "Connector, 6pin, 2.54mm, 500VAC, 3A" "CON: PLD-6"#2 55.88,32 r0 top locked
X8 "Connector, 6pin, 2.54mm, 500VAC, 3A" "CON: PLD-6"#2 81.28,32 r0 top locked
X9 "USB micro B" "CON: USB micro-A (ZX62-B-5PA)" 4.8,9.5 r270 top locked
Z1 "Crystal, 8MHz, 18pF, ±30ppm, case 5032, -20...+70°C" "OSC: 5032" 205,20 r0 top

## Footprints (in the part's own frame and the unit in brackets; to place one, negate y for a bottom-side part, rotate by r counter-clockwise, add the part's x,y. Pads: shape width x height; smd on the part's side, far side on the other; paste and mask are expansions set on the pad)
8-SOIC [mm] "pitch 1.27 mm"
  rrect100% 1.55x0.6 smd: 1(-2.7,1.905) 2(-2.7,0.635) 3(-2.7,-0.635) 4(-2.7,-1.905) 5(2.7,-1.905) 6(2.7,-0.635) 7(2.7,0.635) 8(2.7,1.905)
  round 0.7 on Mech1: 28(-2.395,1.8)
  silkscreen extent -2.82,-2.3 1.61,2.82, body extent -3,-2.45 3,2.45, height 1.75
8-VSSOP [mm]
  rect 0.3x0.7 smd: 1(-0.75,-1.5) 2(-0.25,-1.5) 3(0.25,-1.5) 4(0.75,-1.5) 5(0.75,1.5) 6(0.25,1.5) 7(-0.25,1.5) 8(-0.75,1.5)
  round 0.3 on Top Overlay: ""(-1.2,-1.5)
  round 0.3 on Mech1: ""(-0.75,-1.3)
  silkscreen extent -1,-0.9 1,0.9, body extent -1.05,-1.6 1.05,1.6, height 0.9
"28-QFN (5x5)" [mm] "5x5 mm, pitch 0.5 mm, power pad"
  round 0.7 hole 0.3: 0(-1,1) 0(-1,-1) 0(0,0) 0(1,1) 0(1,-1)
  rect 3.15x3.15 smd: 0(0,0)
  rect 0.8x0.3 smd: 1(-2.3,1.5) 2(-2.3,1) 3(-2.3,0.5) 4(-2.3,0) 5(-2.3,-0.5) 6(-2.3,-1) 7(-2.3,-1.5) 15(2.3,-1.5) 16(2.3,-1) 17(2.3,-0.5) 18(2.3,0) 19(2.3,0.5) 20(2.3,1) 21(2.3,1.5)
  rect 0.3x0.8 smd: 8(-1.5,-2.3) 9(-1,-2.3) 10(-0.5,-2.3) 11(0,-2.3) 12(0.5,-2.3) 13(1,-2.3) 14(1.5,-2.3) 22(1.5,2.3) 23(1,2.3) 24(0.5,2.3) 25(0,2.3) 26(-0.5,2.3) 27(-1,2.3) 28(-1.5,2.3)
  round 0.5 on Top Overlay: ""(-3,2.5)
  round 0.5 on Mech1: ""(-2,2)
  silkscreen extent -2.5,-2.5 2.5,2.5, body extent -2.5,-2.5 2.5,2.5, height 0.9
64-LQFP [mm] "Thin QFP, 64-Leads, Body 10x10mm, Pitch 0.5mm, IPC Medium Density"
  oval 1.4x0.3 smd: 1(-5.7,3.75) 2(-5.7,3.25) 3(-5.7,2.75) 4(-5.7,2.25) 5(-5.7,1.75) 6(-5.7,1.25) 7(-5.7,0.75) 8(-5.7,0.25) 9(-5.7,-0.25) 10(-5.7,-0.75) 11(-5.7,-1.25) 12(-5.7,-1.75) 13(-5.7,-2.25) 14(-5.7,-2.75) 15(-5.7,-3.25) 16(-5.7,-3.75) 33(5.7,-3.75) 34(5.7,-3.25) 35(5.7,-2.75) 36(5.7,-2.25) 37(5.7,-1.75) 38(5.7,-1.25) 39(5.7,-0.75) 40(5.7,-0.25) 41(5.7,0.25) 42(5.7,0.75) 43(5.7,1.25) 44(5.7,1.75) 45(5.7,2.25) 46(5.7,2.75) 47(5.7,3.25) 48(5.7,3.75)
  oval 0.3x1.4 smd: 17(-3.75,-5.7) 18(-3.25,-5.7) 19(-2.75,-5.7) 20(-2.25,-5.7) 21(-1.75,-5.7) 22(-1.25,-5.7) 23(-0.75,-5.7) 24(-0.25,-5.7) 25(0.25,-5.7) 26(0.75,-5.7) 27(1.25,-5.7) 28(1.75,-5.7) 29(2.25,-5.7) 30(2.75,-5.7) 31(3.25,-5.7) 32(3.75,-5.7) 49(3.75,5.7) 50(3.25,5.7) 51(2.75,5.7) 52(2.25,5.7) 53(1.75,5.7) 54(1.25,5.7) 55(0.75,5.7) 56(0.25,5.7) 57(-0.25,5.7) 58(-0.75,5.7) 59(-1.25,5.7) 60(-1.75,5.7) 61(-2.25,5.7) 62(-2.75,5.7) 63(-3.25,5.7) 64(-3.75,5.7)
  round 0.5 on Top Overlay: ""(-5.7,4.4)
  round 0.5 on Mech1: ""(-5.4,5.4)
  silkscreen extent -4.5,-4.5 4.5,4.5, body extent -6,-6 6,6, height 1.5
"BUT: 6x6 SMD" [mm] "Leaded Tactile Button 6x6"
  rect 2.1x1.4 smd: 1(-4.5,2.25) 1(4.5,2.25) 2(-4.5,-2.25) 2(4.5,-2.25)
  silkscreen extent -4.5,-3 4.5,3, body extent -4.5,-3 4.5,3, height 4.3
"BUZ: AT-0927-TT-6-R" [mm]
  round 1.8 hole 1: 1(2,0) 2(-2,0)
  silkscreen extent -4.55,-4.55 4.55,4.55, body extent -4.5,-4.5 4.5,4.5, height 4.52
"CAP: 0805" [mm]
  rect 1x1.25 smd: 1(-1,0) 2(1,0)
  silkscreen extent -1.7,-0.82 1.7,0.82, body extent -1,-0.62 1,0.63, height 0.78
"CON: JUMPER x1" [mm]
  rect 0.5x1 smd: 1(0,0) 2(0.7,0)
  silkscreen extent -0.45,-0.7 1.15,0.7
"CON: PBD-12" [mm] "PBD-12"
  oct 1.8x1.8 hole 1: 1(-6.35,-1.27)
  round 1.8 hole 1: 2(-6.35,1.27) 3(-3.81,-1.27) 4(-3.81,1.27) 5(-1.27,-1.27) 6(-1.27,1.27) 7(1.27,-1.27) 8(1.27,1.27) 9(3.81,-1.27) 10(3.81,1.27) 11(6.35,-1.27) 12(6.35,1.27)
  silkscreen extent -7.78,-2.7 7.78,2.7, body extent -7.61,-2.54 7.61,2.54, height 8.5
"CON: PLD-6"#1 [mm]
  rect 2x2 hole 1: 1(-2.54,-1.27)
  round 2 hole 1: 2(-2.54,1.27) 3(0,-1.27) 4(0,1.27) 5(2.54,-1.27) 6(2.54,1.27)
  silkscreen extent -3.81,-2.54 3.81,2.54, body extent -3.81,-2.54 3.81,2.54, height 8.54
"CON: PLD-6"#2 [mm]
  rect 1.8x1.8 hole 1: 1(-2.54,-1.27)
  round 1.8 hole 1: 2(-2.54,1.27) 3(0,-1.27) 4(0,1.27) 5(2.54,-1.27) 6(2.54,1.27)
  silkscreen extent -3.81,-2.54 3.81,2.54, body extent -3.81,-2.54 3.81,2.54, height 8.54
"CON: PLS-2" [mm]
  rect 2x2 hole 1.1: 1(-1.27,0)
  round 2 hole 1.1: 2(1.27,0)
  silkscreen extent -2.54,-1.27 2.54,1.27, body extent -2.57,-1.28 2.51,1.26, height 8.54
"CON: SM04B-GHS" [mm]
  rect 1x2.7 smd: 0(-3.725,1.225) 0(3.725,1.225)
  rect 0.6x1.7 smd: 1(-1.875,4.425) 2(-0.625,4.425) 3(0.625,4.425) 4(1.875,4.425)
  round 0.5 on Mech13: ""(-3.65,4.4)
  round 0.5 on Top Overlay: ""(-2.95,4.625)
  silkscreen extent -4.2,-0.03 4.2,4.85, body extent -4.1,0 4.15,4.85, height 4.32
"CON: USB micro-A (ZX62-B-5PA)" [mm]
  rect 1.8x1.9 smd: 0(-4,-2.65) 0(4,-2.65)
  rect 2.1x1.6 smd: 0(-3.1,-0.1) 0(3.1,-0.1)
  rect 1.75x1.9 smd: 0(-1.125,-2.65) 0(1.125,-2.65)
  rect 0.4x1.4 smd: 1(-1.3,0) 2(-0.65,0) 3(0,0) 4(0.65,0) 5(1.3,0)
  round 0.5 on Top Overlay: ""(-4.85,0.75)
  silkscreen extent -4.35,-1.25 4.35,0.9, body extent -3.9,-4.8 3.9,0.2, height 2.68
"DIODE: SOD123" [mm]
  rect 0.91x1.22 smd: 1(0,0) 2(3.275,0)
  round 0.5 on Mech1: 4(3,0.4)
  silkscreen extent -0.7,-0.9 4,0.9, body extent -0.25,-0.8 3.45,0.8, height 1.25
"IND: 0805" [mm]
  rect 1x1.25 smd: 1(-1,0) 2(1,0)
  silkscreen extent -1.8,-0.9 1.8,0.9, body extent -1,-0.62 1,0.63, height 0.85
"IND: SRP2510A" [mm]
  rect 0.8x2 smd: 1(-1,0) 2(1,0)
  silkscreen extent -0.3,-0.9 0.3,0.9, body extent -1.29,-1.04 1.28,1.05, height 0.97
"LED: 0603G" [mm]
  rect 0.85x0.85 smd: 1(-0.7,0) 2(0.7,0)
  silkscreen extent -1.33,-0.63 1.33,0.63, body extent -0.8,-0.4 0.8,0.4, height 0.6
"LED: 0805B" [mm]
  rect 1x1.25 smd: 1(-1,0) 2(1,0)
  silkscreen extent -1.7,-0.82 1.7,0.82, body extent -1.05,-0.67 1.05,0.68, height 0.9
"LED: 0805G" [mm]
  rect 1x1.25 smd: 1(-1,0) 2(1,0)
  silkscreen extent -1.7,-0.82 1.7,0.82, body extent -1.05,-0.67 1.05,0.68, height 0.9
"LED: 0805R" [mm]
  rect 1x1.25 smd: 1(-1,0) 2(1,0)
  silkscreen extent -1.7,-0.82 1.7,0.82, body extent -1.05,-0.67 1.05,0.68, height 0.9
"OSC: 5032" [mm]
  rect 1.8x1.2 smd: 1(-2,-1.2) 2(2,-1.2) 3(2,1.2) 4(-2,1.2)
  round 0.5 on Top Overlay: ""(-2.6,-2.2)
  round 0.5 on Mech1: ""(-2,-1.1)
  silkscreen extent -2.6,-1.7 2.6,1.7, body extent -2.5,-1.59 2.5,1.59, height 1.1
"RES: 0805" [mm]
  rect 1x1.25 smd: 1(-1,0) 2(1,0)
  silkscreen extent -1.7,-0.82 1.7,0.82, body extent -1,-0.6 1,0.6, height 0.44
SOT23 [mm]
  rect 1x0.6 smd: 1(-1.2,0.95) 2(-1.2,-0.95) 3(1.2,0)
  round 0.5 on Mech1: ""(-0.9,1.1)
  silkscreen extent -1.32,-1.5 0.7,1.92, body extent -1.32,-1.52 1.32,1.52, height 1.12
SOT23-5 [mm] "pitch 0.95 mm"
  rect 1x0.6 smd: 1(-1.2,0.95) 2(-1.2,0) 3(-1.2,-0.95) 4(1.2,-0.95) 5(1.2,0.95)
  round 0.5 on Mech1: ""(-1.1,1.1)
  silkscreen extent -1.32,-1.5 0.25,1.92, body extent -1.5,-1.5 1.5,1.5, height 1.3
SOT23-6 [mm] "pitch 0.95 mm"
  rect 1x0.55 smd: 1(-1.025,0.95) 2(-1.025,0) 3(-1.025,-0.95) 4(1.025,-0.95) 5(1.025,0) 6(1.025,0.95)
  round 0.5 on Mech1: ""(-0.8,1)
  silkscreen extent -1.15,-1.5 0.25,1.9, body extent -1.4,-1.45 1.4,1.45, height 1.45
SOT23-8 [mm] "pitch 0.95 mm"
  rect 1x0.4 smd: 1(-1.3,0.975) 2(-1.3,0.325) 3(-1.3,-0.325) 4(-1.3,-0.975) 5(1.3,-0.975) 6(1.3,-0.325) 7(1.3,0.325) 8(1.3,0.975)
  round 0.5 on Mech1: ""(-0.9,1)
  silkscreen extent -1.47,-1.5 0.45,1.9, body extent -1.4,-1.47 1.4,1.47, height 1.2

## Part data
BF1: library part Buzzer, CurrentMax=80mA, Frequency="2.73 kHz", Manufacturer="PUI Audio", PartNumber=AT-0927-TT-6-R, Temperature=-20...+70°C, VoltageMax=3VDC, HelpURL=https://www.digikey.com/products/en?keywords=AT-0927-TT-6-R, TypeBuzzer="DIP switch", ValueManufacturerPartNumber="DIP switch, 2.73 kHz, 3VDC, 80mA, -20...+70°C"
C1 C3 C4 C5 C6 C7 C11 C16 C17 C18 C20 C21 C23 C25 C26 C28 C30 C31 C33 C35 C36 C38 C39 C42: library part Ceramic_0805, Manufacturer=Yageo, Package=0805, PartNumber=CC0805KRX7R7BB104, Temperature=-55...+125°C, Tolerance=±10%, TypeCapacitor="Ceramic capacitor", TypeDielectric=X7R, ValueManufacturerPartNumber="Ceramic capacitor, 0.1?F, X7R, ±10%, 16V, 0805, -55...+125°C", Voltage=16V, HelpURL=https://www.digikey.com/product-detail/en/yageo/CC0805KRX7R7BB104/311-1142-1-ND/303052
C2 C10 C41: library part Ceramic_0805, Manufacturer=Yageo, Package=0805, PartNumber=CC0805KKX7R7BB105, Temperature=-55...+125°C, Tolerance=±10%, TypeCapacitor="Ceramic capacitor", TypeDielectric=X7R, ValueManufacturerPartNumber="Ceramic capacitor, 1?F, X7R, ±10%, 16V, 0805, -55...+125°C", Voltage=16V, HelpURL=https://www.digikey.com/product-detail/en/yageo/CC0805KKX7R7BB105/311-1365-1-ND/2103149
C8 C9: library part Ceramic_0805, Manufacturer=Yageo, Package=0805, PartNumber=CC0805JRNPO9BN180, Temperature=-55...+125°C, Tolerance=±10%, TypeCapacitor="Ceramic capacitor", TypeDielectric=NPO, Voltage=50V, HelpURL=https://www.digikey.com/product-detail/en/yageo/CC0805JRNPO9BN180/311-1102-1-ND/303012, ValueManufacturerPartNumber="Ceramic capacitor, 18pF, NPO, ±10%, 50V, 0805, -55...+125°C"
C12 C13 C19 C22 C24 C27 C29 C32 C34 C37: library part Ceramic_0805, Manufacturer=Yageo, Package=0805, PartNumber=CC0805KRX7R9BB103, Temperature=-55...+125°C, Tolerance=±10%, TypeCapacitor="Ceramic capacitor", TypeDielectric=X7R, ValueManufacturerPartNumber="Ceramic capacitor, 0.01?F, X7R, ±10%, 50V, 0805, -55...+125°C", Voltage=50V, HelpURL=https://www.digikey.com/product-detail/en/yageo/CC0805KRX7R9BB103/311-1136-1-ND/303046
C14: library part Ceramic_0805, Manufacturer=Samsung, Package=0805, PartNumber=CL21B475KAFNNNE, Temperature=-55...+125°C, Tolerance=±10%, TypeCapacitor="Ceramic capacitor", TypeDielectric=X7R, ValueManufacturerPartNumber="Ceramic capacitor, 4.7?F, X7R, ±10%, 25V, 0805, -55...+125°C", Voltage=25V, HelpURL=https://www.digikey.com/product-detail/en/samsung-electro-mechanics/CL21B475KAFNNNE/1276-2969-1-ND/3891055
C15 C40: library part Ceramic_0805, Manufacturer=Samsung, Package=0805, PartNumber=CL21B106KQQNNNE, Temperature=-55...+125°C, Tolerance=±10%, TypeCapacitor="Ceramic capacitor", TypeDielectric=X7R, ValueManufacturerPartNumber="Ceramic capacitor, 10?F, X7R, ±10%, 6.3V, 0805, -55...+125°C", Voltage=6.3V, HelpURL=https://www.digikey.com/product-detail/en/samsung-electro-mechanics/CL21B106KQQNNNE/1276-1113-1-ND/3889199
D1: library part STM32G474RET6, "Cortex-M4", Manufacturer=STMicroelectronics, Package=64-LQFP, Temperature=-40...+85°C, ComponentType="IC microcontroller", CoreProcessor=Cortex-M4, CoreSize=32-Bit, HelpURL=https://ru.mouser.com/ProductDetail/STMicroelectronics/STM32G474RET6?qs=sGAEpiMZZMuoKKEcg8mMKJ29ob8kKavQ9P%2FqSgFiHIM%252Bu3HfOPgZJg%3D%3D, MemoryRAM=128KB, MemoryROM=512KB, PartNumber=STM32G474RET6, Speed=170MHz, Supply=1.71...3.6V, ValueManufacturerPartNumber="IC microcontroller, 32-Bit, Cortex-M4, 170MHz, 512KB, 128KB, 1.71...3.6V, -40...+85°C, 64-LQFP"
D2: library part 24AA01T, "EEPROM", Manufacturer="Microchip Technology", Package=SOT-23-5, PartNumber=24AA01T-I/OT, Temperature=-40...+85°C, ComponentType="IC memory", HelpURL=https://www.digikey.com/product-detail/en/microchip-technology/24AA01T-I-OT/24AA01T-I-OTCT-ND/857670, InterfaceData=I2C, MemorySize="1KB (128x8)", MemoryType=EEPROM, Speed="400 kHz", Supply=1.7...5.5V, ValueManufacturerPartNumber="IC memory, EEPROM, 1KB (128x8), 400 kHz, I2C, 1.7...5.5V, -40...+85°C, SOT-23-5"
D3: library part AP3211KTR-G1, "Buck converter", CurrentOutput=1.5A, Frequency=1.4MHz, Manufacturer="Diodes Incorporated", Package=SOT23-6, Temperature=-40...+85°C, VoltageInput="input 4.5...18V", VoltageOutput="output 0.81...15V", ComponentType="DC/DC buck converter", HelpURL=https://www.digikey.com/product-detail/en/diodes-incorporated/AP3211KTR-G1/AP3211KTR-G1DICT-ND/4505305, PartNumber=AP3211KTR-G1, ValueManufacturerPartNumber="DC/DC buck converter, input 4.5...18V, 1.4MHz, output 0.81...15V, 1.5A, -40...+85°C, SOT23-6"
D4 D7 D13 D19 D25: library part SN74LVC2G34DBVR, "Buffer", Manufacturer="Texas Instruments", Package=SOT23-6, Temperature=-40...+125°C, ComponentType="IC logic buffer", HelpURL=https://www.digikey.com/product-detail/en/texas-instruments/SN74LVC2G34DBVR/296-13496-1-ND/486431, PartNumber=SN74LVC2G34DBVR, Supply=1.65...5.5V, ValueManufacturerPartNumber="IC logic buffer, 1.65...5.5V, -40...+125°C, SOT23-6"
D5 D6 D11 D12 D17 D18 D23 D24: library part SN74AUP2G08DCUR, "AND", Manufacturer="Texas Instruments", Package=8-VSSOP, Temperature=-40...+855°C, ComponentType="IC logic AND", HelpURL=https://www.digikey.com/product-detail/en/texas-instruments/SN74AUP2G08DCUR/296-32271-1-ND/3505517, PartNumber=SN74AUP2G08DCUR, Supply=0.8...3.6V, ValueManufacturerPartNumber="IC logic AND, 0.8...3.6V, -40...+855°C, 8-VSSOP"
D8 D14 D20 D26: library part SN74LVC1G86DBVR, "XOR", Manufacturer="Texas Instruments", Package=SOT23-5, Temperature=-40...+125°C, ComponentType="IC logic XOR", HelpURL=https://www.digikey.com/product-detail/en/texas-instruments/SN74LVC1G86DBVR/296-9853-1-ND/380077, PartNumber=SN74LVC1G86DBVR, Supply=1.65...5.5V, ValueManufacturerPartNumber="IC logic XOR, 1.65...5.5V, -40...+125°C, SOT23-5"
D9 D15 D21 D27: library part SN74AUP1G74DCUR, "D-trigger", Manufacturer="Texas Instruments", Package=8-VSSOP, Temperature=-40...+85°C, ComponentType="ICtrigger D-type", HelpURL=https://www.digikey.com/product-detail/en/texas-instruments/SN74AUP1G74DCUR/296-19761-1-ND/1091423, PartNumber=SN74AUP1G74DCUR, Supply=0.8...3.6V, ValueManufacturerPartNumber="ICtrigger D-type, 0.8...3.6V, -40...+85°C, 8-VSSOP"
D10 D16 D22 D28: library part SN74AUP1G17DBVR, "Schmitt trigger", Manufacturer="Texas Instruments", Package=SOT23-6, Temperature=-40...+85°C, ComponentType="IC Schmitt trigger", HelpURL=https://www.digikey.com/product-detail/en/texas-instruments/SN74AUP1G17DBVR/296-19077-1-ND/864308, PartNumber=SN74AUP1G17DBVR, Supply=0.8...3.6V, ValueManufacturerPartNumber="IC Schmitt trigger, 0.8...3.6V, -40...+85°C, SOT23-6"
D29: library part ISO7721DR, "Digital isolator", Manufacturer="Texas Instruments", Package=8-SOIC, Temperature=-55...+125°C, ComponentType="IC digital isolator", DataRate=100Mbps, HelpURL=https://www.digikey.com/product-detail/en/texas-instruments/ISO7721DR/296-48296-1-ND/8347715, Isolation=3000Vrms, PartNumber=ISO7721DR, Supply=2.25...5.5V, ValueManufacturerPartNumber="IC digital isolator, 100Mbps, 3000Vrms, 2.25...5.5V, -55...+125°C, 8-SOIC"
D30: library part CP2102N, "USB-to-UART", Manufacturer="Silicon Labs", Package=28-VFQFN, PartNumber=CP2102N-A02-GQFN28, Temperature=-40...+85°C, ComponentType="IC usb-to-uart bridge", HelpURL=https://www.digikey.com/product-detail/en/silicon-labs/CP2102N-A02-GQFN28/336-5889-ND/9863477, Standard=USB2.0, Supply=3...3.6V, ValueManufacturerPartNumber="IC usb-to-uart bridge, USB2.0, 3...3.6V, -40...+85°C, 28-VFQFN"
D31: library part TCAN334DCNR, "CAN", Manufacturer="Texas Instruments", Package=SOT23-8, Temperature=-40...+125°C, ComponentType="IC CAN transceiver", DataRate=1Mbps, HelpURL=https://www.digikey.com/product-detail/en/texas-instruments/TCAN334DCNR/296-47830-1-ND/8133179, PartNumber=TCAN334DCNR, Supply=3...3.6V, TypeDuplex=Half-duplex, ValueManufacturerPartNumber="IC CAN transceiver, 1Mbps, Half-duplex, 3...3.6V, -40...+125°C, SOT23-8"
J1: library part Jumper_single, CommentText="\"Ïåðåìû÷êà\""
L1: library part Inductor_0805, Manufacturer="Murata Electronics", MaxCurrent=100mA, Package=0805, PartNumber=LQM21FN100M70L, Temperature=-55...+125°C, Tolerance=±20%, TypeInductor="Fixed inductor", ValueManufacturerPartNumber="Fixed inductor, 10?H, ±20%, 0805, 100mA, -55...+125°C", HelpURL=https://www.digikey.com/product-detail/en/murata-electronics-north-america/LQM21FN100M70L/490-4029-1-ND/1016289
L2: library part Inductor_SRP2510A, Manufacturer=Bourns, MaxCurrent=1.36A, Package=SRP2510A, PartNumber=SRP2510A-4R7M, Temperature=-40...+125°C, Tolerance=±20%, TypeInductor="Fixed inductor", ValueManufacturerPartNumber="Fixed inductor, 4.7?H, ±20%, SRP2510A, 1.36A, -40...+125°C", HelpURL=https://www.digikey.com/product-detail/en/bourns-inc/SRP2510A-4R7M/SRP2510A-4R7MCT-ND/7354840
R1 R2 R13: library part Resistor_0805, Manufacturer=Yageo, Package=0805, PartNumber=RC0805JR-074K7L, Power=0.125W, Temperature=-55...+125°C, Tolerance=±5%, TypeResistor="Resistor film", HelpURL=https://www.digikey.com/product-detail/en/yageo/RC0805JR-074K7L/311-4.7KARCT-ND/731274, ValueManufacturerPartNumber="Resistor film, 4k7, ±5%, 0805, 0.125W, -55...+125°C"
R3 R7 R17 R24 R28 R31 R35 R38 R42 R45 R49 R50 R51 R56 R57: library part Resistor_0805, Manufacturer=Yageo, Package=0805, PartNumber=RC0805JR-07100RL, Power=0.125W, Temperature=-55...+125°C, Tolerance=±5%, TypeResistor="Resistor film", HelpURL=https://www.digikey.com/product-detail/en/yageo/RC0805JR-07100RL/311-100ARCT-ND/731185, ValueManufacturerPartNumber="Resistor film, 100R, ±5%, 0805, 0.125W, -55...+125°C"
R4 R5 R6 R8 R15 R19 R20 R21 R22 R23 R25 R27 R29 R30 R32 R34 R36 R37 R39 R41 R43 R44 R46 R48: library part Resistor_0805, Manufacturer=Yageo, Package=0805, PartNumber=RC0805JR-0710KL, Power=0.125W, Temperature=-55...+125°C, Tolerance=±5%, TypeResistor="Resistor film", HelpURL=https://www.digikey.com/product-detail/en/yageo/RC0805JR-0710KL/311-10KARCT-ND/731188, ValueManufacturerPartNumber="Resistor film, 10k, ±5%, 0805, 0.125W, -55...+125°C"
R9 R10 R11 R12 R14 R26 R33 R40 R47: library part Resistor_0805, Manufacturer=Yageo, Package=0805, PartNumber=RC0805JR-07470RL, Power=0.125W, Temperature=-55...+125°C, Tolerance=±5%, TypeResistor="Resistor film", HelpURL=https://www.digikey.com/product-detail/en/yageo/RC0805JR-07470RL/311-470ARCT-ND/731280, ValueManufacturerPartNumber="Resistor film, 470R, ±5%, 0805, 0.125W, -55...+125°C"
R16: library part Resistor_0805, Manufacturer=Yageo, Package=0805, PartNumber=RC0805JR-078K2L, Power=0.125W, Temperature=-55...+125°C, Tolerance=±5%, TypeResistor="Resistor film", HelpURL=https://www.digikey.com/product-detail/en/yageo/RC0805JR-078K2L/311-8.2KARCT-ND/731320, ValueManufacturerPartNumber="Resistor film, 8k2, ±5%, 0805, 0.125W, -55...+125°C"
R18: library part Resistor_0805, Manufacturer=Yageo, Package=0805, PartNumber=RC0805JR-072K7L, Power=0.125W, Temperature=-55...+125°C, Tolerance=±5%, TypeResistor="Resistor film", HelpURL=https://www.digikey.com/product-detail/en/yageo/RC0805JR-072K7L/311-2.7KARCT-ND/731224, ValueManufacturerPartNumber="Resistor film, 2k7, ±5%, 0805, 0.125W, -55...+125°C"
R52 R55: library part Resistor_0805, Manufacturer=Yageo, Package=0805, PartNumber=RC0805JR-071KL, Power=0.125W, Temperature=-55...+125°C, Tolerance=±5%, TypeResistor="Resistor film", HelpURL=https://www.digikey.com/product-detail/en/yageo/RC0805JR-071KL/311-1.0KARCT-ND/731165, ValueManufacturerPartNumber="Resistor film, 1k, ±5%, 0805, 0.125W, -55...+125°C"
R53 R54: library part Resistor_0805, Manufacturer=Yageo, Package=0805, PartNumber=RC0805JR-0722RL, Power=0.125W, Temperature=-55...+125°C, Tolerance=±5%, TypeResistor="Resistor film", HelpURL=https://www.digikey.com/product-detail/en/yageo/RC0805JR-0722RL/311-22ARCT-ND/731232, ValueManufacturerPartNumber="Resistor film, 22R, ±5%, 0805, 0.125W, -55...+125°C"
R58: library part Resistor_0805, Manufacturer=Yageo, Package=0805, PartNumber=RC0805JR-07120RL, Power=0.125W, Temperature=-55...+125°C, Tolerance=±5%, TypeResistor="Resistor film", HelpURL=https://www.digikey.com/product-detail/en/yageo/RC0805JR-07120RL/311-120ARCT-ND/731194, ValueManufacturerPartNumber="Resistor film, 120R, ±5%, 0805, 0.125W, -55...+125°C"
SB1: library part Button_tactile, Manufacturer="TE Connectivity", Package=6x6mm, PartNumber=FSM2JSMAATR, CommentText="\"Êíîïêà\"", HelpURL=https://www.digikey.com/product-detail/en/te-connectivity-alcoswitch-switches/FSM2JSMAATR/450-1792-1-ND/3503931, TypeButton="Tactile button", ValueManufacturerPartNumber="Tactile button, 6x6mm"
VD1: library part LED_single, Color=BLUE, Current=20mA, Manufacturer=Wurth, Package=0805, PartNumber=150080BS75000, Temperature=-55...+150°C, VoltageDrop=3.2V, HelpURL=https://www.digikey.com/product-detail/en/wurth-electronics-inc/150080BS75000/732-4982-1-ND/4489910, TypeDiode=LED, ValueManufacturerPartNumber="LED, 20mA, 3.2V, 0805, -55...+150°C"
VD2 VD4 VD10 VD13 VD16 VD19: library part LED_single, Color=RED, Current=20mA, Manufacturer=Wurth, Package=0805, PartNumber=150080RS75000, Temperature=-55...+150°C, VoltageDrop=2V, HelpURL=https://www.digikey.com/product-detail/en/wurth-electronics-inc/150080RS75000/732-4984-1-ND/4489916, TypeDiode=LED, ValueManufacturerPartNumber="LED, 20mA, 2V, 0805, -55...+150°C"
VD3 VD5 VD6 VD21: library part LED_single, Color=GREEN, Current=20mA, Manufacturer=Wurth, Package=0805, PartNumber=150080VS75000, Temperature=-55...+150°C, VoltageDrop=2V, HelpURL=https://www.digikey.com/product-detail/en/wurth-electronics-inc/150080VS75000/732-4986-1-ND/4489922, TypeDiode=LED, ValueManufacturerPartNumber="LED, 20mA, 2V, 0805, -55...+150°C"
VD7 VD8: library part Schottky_single, Current=2A, Manufacturer="Diodes Incorporated", Package=SOD-123, PartNumber=APD240KDTR-G1, Temperature=-55...+150°C, Voltage=40V, VoltageDrop=500mV, HelpURL=https://www.digikey.com/product-detail/en/diodes-incorporated/APD240KDTR-G1/APD240KDTR-G1DICT-ND/7708824, RecoveryTime=15pF, TypeDiode="Schottky diode", ValueManufacturerPartNumber="Schottky diode, 40V, 2A, 500mV, 15pF, SOD-123, -55...+150°C"
VD9 VD11 VD12 VD14 VD15 VD17 VD18 VD20: library part Diode_array, Current=140mA, Manufacturer="Diodes Incorporated", Package=SOT-23, PartNumber=BAV199-7-F, Temperature=-65...+150°C, Voltage=85V, VoltageDrop=1.1V, HelpURL=https://www.digikey.com/product-detail/en/diodes-incorporated/BAV199-7-F/BAV199-FDICT-ND/1033647, RecoveryTime=3us, TypeDiode="Diode array", ValueManufacturerPartNumber="Diode array, 85V, 140mA, 1.1V, 3us, SOT-23, -65...+150°C"
VD22: library part TVS_array, Current="350W peak", Manufacturer="ON Semiconductor", Package=SOT-23, PartNumber=SZNUP2105LT1G, Temperature=-55...+150°C, Voltage=24V, VoltageDrop=30pF, HelpURL=https://www.digikey.com/product-detail/en/on-semiconductor/SZNUP2105LT1G/SZNUP2105LT1GOSCT-ND/3487669, RecoveryTime=17Ohm, TypeDiode="Zener diode", ValueManufacturerPartNumber="Zener diode, 24V, 350W peak, 30pF, 17Ohm, SOT-23, -55...+150°C"
VT1: library part MOSFET_N_132, CurrentDS=5.3A, InputCapacitor=382pF, Manufacturer="Infineon Technologies", MaxPower=2.5W, Package=SOT-23, PartNumber=IRLML0030TRPBF, Temperature=-55...+150°C, VoltageDS=30V, GateCharge=2.6nC, HelpURL=https://www.digikey.com/product-detail/en/infineon-technologies/IRLML0030TRPBF/IRLML0030TRPBFCT-ND/2202231, RDS=27mOhm, TypeTransistor="MOSFET N-channel transistor", ValueManufacturerPartNumber="MOSFET N-channel transistor, 30V, 5.3A, 2.6nC, 2.5W, 27mOhm, 382pF, SOT-23, -55...+150°C"
X1: library part Connector_SM04B, CurrentMax=1A, Manufacturer=JST, PartNumber=SM04B-GHS, VoltageMax=50VDC, CommentText="\"Debug\"", HelpURL=https://www.digikey.com/product-detail/en/jst-sales-america-inc/SM04B-GHS-TB-LF-SN/455-1566-1-ND/807834, Multichannel=4pin, Pitch=1.25mm, TypeConnector=Connector, ValueManufacturerPartNumber="Connector, 4pin, 1.25mm, 50VDC, 1A"
X2: library part PLS-2, CurrentMax=3A, Manufacturer=Connfly, VoltageMax=500VAC, CommentText="\"Temp sensor\"", HelpURL=https://www.chipdip.ru/product/pls-2, Multichannel=2pin, PartNumber=PLS-2, Pitch=2.54mm, TypeConnector=Connector, ValueManufacturerPartNumber="Connector, 2pin, 2.54mm, 500VAC, 3A"
X3: library part PBD-12, CurrentMax=3A, Manufacturer=Connfly, VoltageMax=500VAC, CommentText="\"Îáùèé ââîä\"", HelpURL=https://www.chipdip.ru/product/pbd-12, Multichannel=12pin, PartNumber=PBD-12, Pitch=2.54mm, TypeConnector=Connector, ValueManufacturerPartNumber="Connector, 12pin, 2.54mm, 500VAC, 3A"
X4 X5 X6 X7 X8: library part PLD-6, CurrentMax=3A, Manufacturer=Connfly, VoltageMax=500VAC, HelpURL=https://www.chipdip.ru/product/pld-6, Multichannel=6pin, PartNumber=PLD-6, Pitch=2.54mm, TypeConnector=Connector, ValueManufacturerPartNumber="Connector, 6pin, 2.54mm, 500VAC, 3A"
  X4: CommentText="\"Ïèòàíèå\""
  X5: CommentText="\"Êàíàë À\""
  X6: CommentText="\"Êàíàë B\""
  X7: CommentText="\"Êàíàë C\""
  X8: CommentText="\"Êàíàë D\""
X9: library part Connector_USB_micro_B, Manufacturer="Hirose Electric", PartNumber=ZX62-B-5PA, CommentText="\"USB\"", HelpURL=https://www.digikey.com/product-detail/en/hirose-electric-co-ltd/ZX62-B-5PA/H11579CT-ND/1851090, TypeConnector="USB micro B", ValueManufacturerPartNumber="USB micro B"
Z1: library part Crystal_5032, Frequency=8MHz, LoadCapacitance=18pF, Manufacturer="Diodes Incorporated", Package="case 5032", PartNumber=ABM3B-8.000MHZ-B2-T, Temperature=-20...+70°C, Tolerance=±30ppm, HelpURL=https://www.digikey.com/product-detail/en/abracon-llc/ABM3B-8.000MHZ-B2-T/535-9720-1-ND/1873254, TypeOscilator=Crystal, ValueManufacturerPartNumber="Crystal, 8MHz, 18pF, ±30ppm, case 5032, -20...+70°C"

## Via types
v1: diameter 0.7, hole 0.3, Top Layer to Bottom Layer, tented both sides, 29 vias

## Nets (pads, with @x,y where several pads share a name; then routed paths per layer and width w, separated by ;. In a path a pad name is that pad's centre, name@x,y a point inside that pad or via, vN(x,y) a via of type N, cw(c..) or ccw(c..) an arc to the next point about the centre after c; other vN are vias at no path point)
ADC1-IN1: C19.2 D1.12 R24.1
ADC1-IN2: C22.2 D1.13 R28.1
ADC1-IN3: C24.2 D1.14 R31.1
ADC1-IN4: C27.2 D1.17 R35.1
ADC2-IN6: C29.2 D1.8 R38.1
ADC2-IN7: C32.2 D1.9 R42.1
ADC2-IN8: C34.2 D1.10 R45.1
ADC2-IN9: C37.2 D1.11 R49.1
ADC3-IN12: C16.2 D1.24 R17.1
ADC-CHA1: R24.2 VD9.3 X5.1
ADC-CHA2: R28.2 VD11.3 X5.5
ADC-CHB1: R31.2 VD12.3 X6.1
ADC-CHB2: R35.2 VD14.3 X6.5
ADC-CHC1: R38.2 VD15.3 X7.1
ADC-CHC2: R42.2 VD17.3 X7.5
ADC-CHD1: R45.2 VD18.3 X8.1
ADC-CHD2: R49.2 VD20.3 X8.5
CAN2-RX: D1.58 R57.1
CAN2-TX: D1.59 R56.1
CAN-H: D31.7 R58.2 VD22.1 X3.4
CAN-L: D31.6 R58.1 VD22.2 X3.5
FAULT-CLR-CHA: D1.18 D9.6 R25.2
FAULT-CLR-CHB: D1.19 D15.6 R32.2
FAULT-CLR-CHC: D1.20 D21.6 R39.2
FAULT-CLR-CHD: D1.21 D27.6 R46.2
FAULT-INA: D10.2 R27.1 X5.4
FAULT-INB: D16.2 R34.1 X6.4
FAULT-INC: D22.2 R41.1 X7.4
FAULT-IND: D28.2 R48.1 X8.4
GND: C1.1 C2.1 C3.1 C4.1 C5.1 C6.1 C7.1 C8.1 C9.1 C10.1 C11.1 C12.1 C14.1 C15.1 C16.1 C17.1 C18.1 C19.1 C20.1 C21.1 C22.1 C23.1 C24.1 C25.1 C26.1 C27.1 C28.1 C29.1 C30.1 C31.1 C32.1 C33.1 C34.1 C35.1 C36.1 C37.1 C39.1 C42.1 D1.15 D1.27 D1.31 D1.47 D1.63 D2.2 D2.5 D3.2 D4.2 D5.4 D6.4 D7.2 D8.3 D9.4 D10.3 D11.4 D12.4 D13.2 D14.3 D15.4 D16.3 D17.4 D18.4 D19.2 D20.3 D21.4 D22.3 D23.4 D24.4 D25.2 D26.3 D27.4 D28.3 D29.5 D31.2 J1.2 R4.2 R8.2 R18.1 R19.1 R20.2 R21.2 R22.1 R23.2 R27.2 R29.1 R30.2 R34.2 R36.1 R37.2 R41.2 R43.1 R44.2 R48.2 SB1.1 VD1.2 VD2.2 VD3.2 VD4.2 VD5.2 VD6.2 VD7.1 VD9.1 VD10.2 VD11.1 VD12.1 VD13.2 VD14.1 VD15.1 VD16.2 VD17.1 VD18.1 VD19.2 VD20.1 VD22.3 VT1.2 X1.2 X3.3 X3.6 X3.10 X4.4 X4.5 X4.6 X5.3 X6.3 X7.3 X8.3 Z1.2 Z1.4
GND2: C38.1 C40.1 C41.1 D29.4 D30.0 D30.3 VD21.2 X9.0 X9.5 | length 3.5
  Top Layer w0.3: D30.0@10.2,4.4 10.2,4.508 10.7,5.008 D30.3 10.7,7.4 10.9,7.6
  other v1: 7.5,0.7 8.4,0.7 9.3,0.7 10.2,0.7 11.1,0.7 12,0.7 12.9,0.7 13.8,0.7 14.7,0.7 15.6,0.7 1.5,1.2 0.9,2 0.7,2.9 0.7,3.9 3.9,4.7 5.4,4.7 2.15,6.95 13.2,7.2 16.1,7.3 6.4,8.2 16.1,8.2 16.1,9.1 2.15,12.075 6.2,12.6 4.7,14.3
HRPWM-CHA1: D1.42 D5.1 D8.1 R22.2
HRPWM-CHA2: D1.43 D5.6 D8.2 R23.1
HRPWM-CHB1: D1.44 D11.1 D14.1 R29.2
HRPWM-CHB2: D1.45 D11.6 D14.2 R30.1
HRPWM-CHC1: D1.34 D17.1 D20.1 R36.2
HRPWM-CHC2: D1.35 D17.6 D20.2 R37.1
HRPWM-CHD1: D1.36 D23.1 D26.1 R43.2
HRPWM-CHD2: D1.37 D23.6 D26.2 R44.1
HRPWM-FLT1: D1.46 D9.1 D10.4
HRPWM-FLT2: D1.51 D15.1 D16.4
HRPWM-FLT3: D1.30 D21.1 D22.4
HRPWM-FLT4: D1.33 D27.1 D28.4
HRPWM-SYNCI: D1.26 D4.4
HRPWM-SYNCO: D1.25 D4.1 R20.1
I2C3-SCL: D1.40 D2.1 R2.2
I2C3-SDA: D1.41 D2.3 R1.2
IO1: D1.38 X3.1
IO2: D1.39 X3.2
NetBF1_2: BF1.2 VT1.3
NetC3_2: C3.2 D1.7 R6.2
NetC8_2: C8.2 D1.6 Z1.1
NetC9_2: C9.2 D1.5 Z1.3
NetC11_2: C11.2 C12.2 D1.28 D1.29 L1.1
NetC13_1: C13.1 D3.6 L2.2 VD7.2
NetC13_2: C13.2 D3.1
NetC41_2: C41.2 D30.6 R55.2 | length 9.5
  Top Layer w0.3: R55.2 C41.2 5.6,3.325 C41.2@5.675,3.4 ; C41.2@5.6,3.4 C41.2@5.675,3.4 ; D30.6 9.2,7.3 8.9,7.6 7.3,7.6 7,7.3 7,6 6.4,5.4 6.4,4.125 C41.2@5.675,3.4
NetD1_49: D1.49 X1.4
NetD1_50: D1.50 X1.3
NetD1_61: D1.61 R8.1
NetD3_3: D3.3 R16.1 R18.2
NetD3_4: D3.4 R15.2
NetD4_3: D4.3 R21.1 X3.12
NetD4_6: D4.6 X3.11
NetD5_2: D5.2 D5.5 D8.4
NetD5_3: D5.3 D6.5
NetD5_7: D5.7 D6.1
NetD6_2: D6.2 D6.6 D9.3
NetD6_3: D6.3 D7.3
NetD6_7: D6.7 D7.1
NetD7_4: D7.4 X5.6
NetD7_6: D7.6 X5.2
NetD9_5: D9.5 R26.2
NetD11_2: D11.2 D11.5 D14.4
NetD11_3: D11.3 D12.5
NetD11_7: D11.7 D12.1
NetD12_2: D12.2 D12.6 D15.3
NetD12_3: D12.3 D13.3
NetD12_7: D12.7 D13.1
NetD13_4: D13.4 X6.6
NetD13_6: D13.6 X6.2
NetD15_5: D15.5 R33.2
NetD17_2: D17.2 D17.5 D20.4
NetD17_3: D17.3 D18.5
NetD17_7: D17.7 D18.1
NetD18_2: D18.2 D18.6 D21.3
NetD18_3: D18.3 D19.3
NetD18_7: D18.7 D19.1
NetD19_4: D19.4 X7.6
NetD19_6: D19.6 X7.2
NetD21_5: D21.5 R40.2
NetD23_2: D23.2 D23.5 D26.4
NetD23_3: D23.3 D24.5
NetD23_7: D23.7 D24.1
NetD24_2: D24.2 D24.6 D27.3
NetD24_3: D24.3 D25.3
NetD24_7: D24.7 D25.1
NetD25_4: D25.4 X8.6
NetD25_6: D25.6 X8.2
NetD27_5: D27.5 R47.2
NetD29_2: D29.2 D30.25 | length 2.9
  Top Layer w0.2: D30.25 13.588,4.4 13.738,4.55 14.65,4.55 14.775,4.675 14.775,5.11 D29.2
NetD29_3: D29.3 D30.26 | length 6.7
  Top Layer w0.2: D30.26 13.3,4.9 13.6,5.2 13.6,5.5 13.875,5.775 15.575,5.775 15.9,5.45 15.9,4.04 15.725,3.865 D29.3
NetD29_6: D29.6 R51.1 | length 2.8
  Top Layer w0.5: D29.6 20.219,3.846 21.154,3.846 21.725,3.275 22.25,3.275 22.5,3.025 R51.1
NetD29_7: D29.7 R50.1 | length 2.5
  Top Layer w0.5: D29.7 20.219,5.116 21.307,5.116 21.6,4.823 22.277,4.823 R50.1
NetD30_4: D30.4 R54.2 | length 2.4
  Top Layer w0.3: D30.4 10.2,8.8 R54.2
NetD30_5: D30.5 R53.2 | length 4.9
  Top Layer w0.3: D30.5 9.7,7.9 9.4,8.2 9.4,10.4 9.6,10.6 10.3,10.6 R53.2
NetD30_9: D30.9 R55.1 | length 9.6